# Altium PCB MSS_PCB.PcbDoc (part 1 of 2)
Units mm, origin at the board's own origin, x right, y up, seen from the top; angles counter-clockwise.
Board outline 160 x 110 mm, 4 copper layers (L1 (Signal), L2 (GND), L3 (GND), L4 (Signal)), stack 1.369 mm thick; 208 components, 129 nets, 584 pads, 198 vias.
Unrouted connection lines stored in the file: 1.
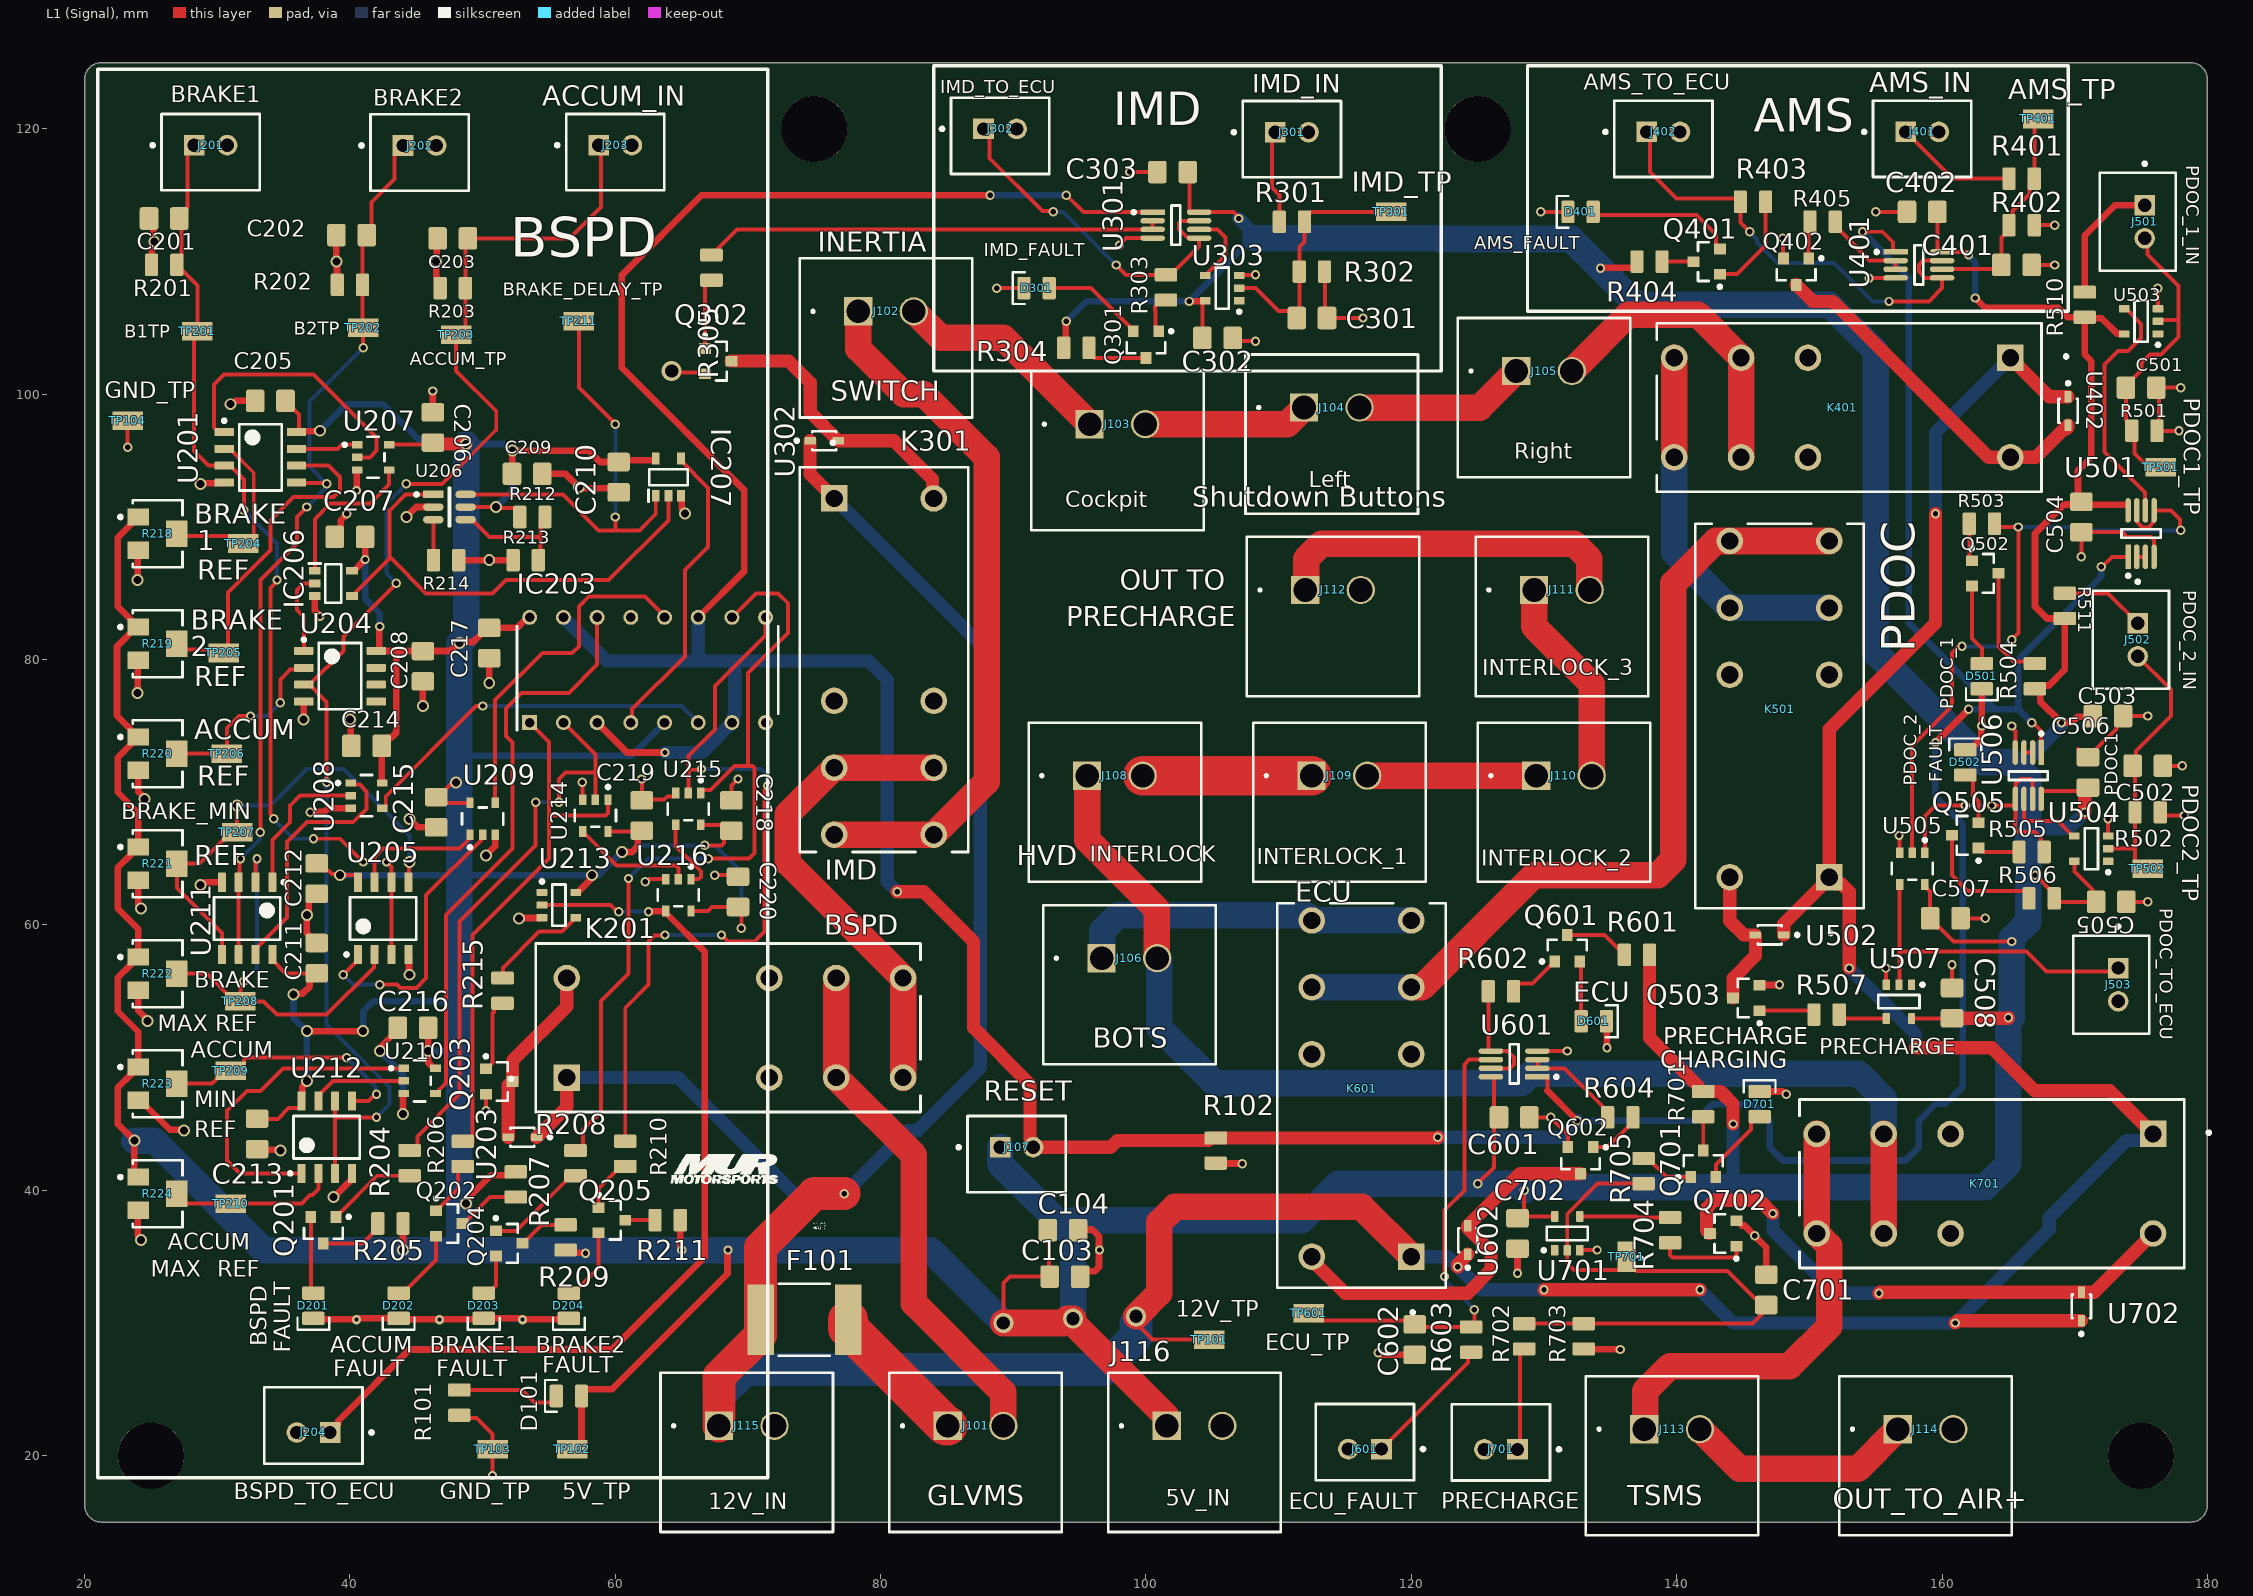
[diagram p0: L1 (Signal) view]
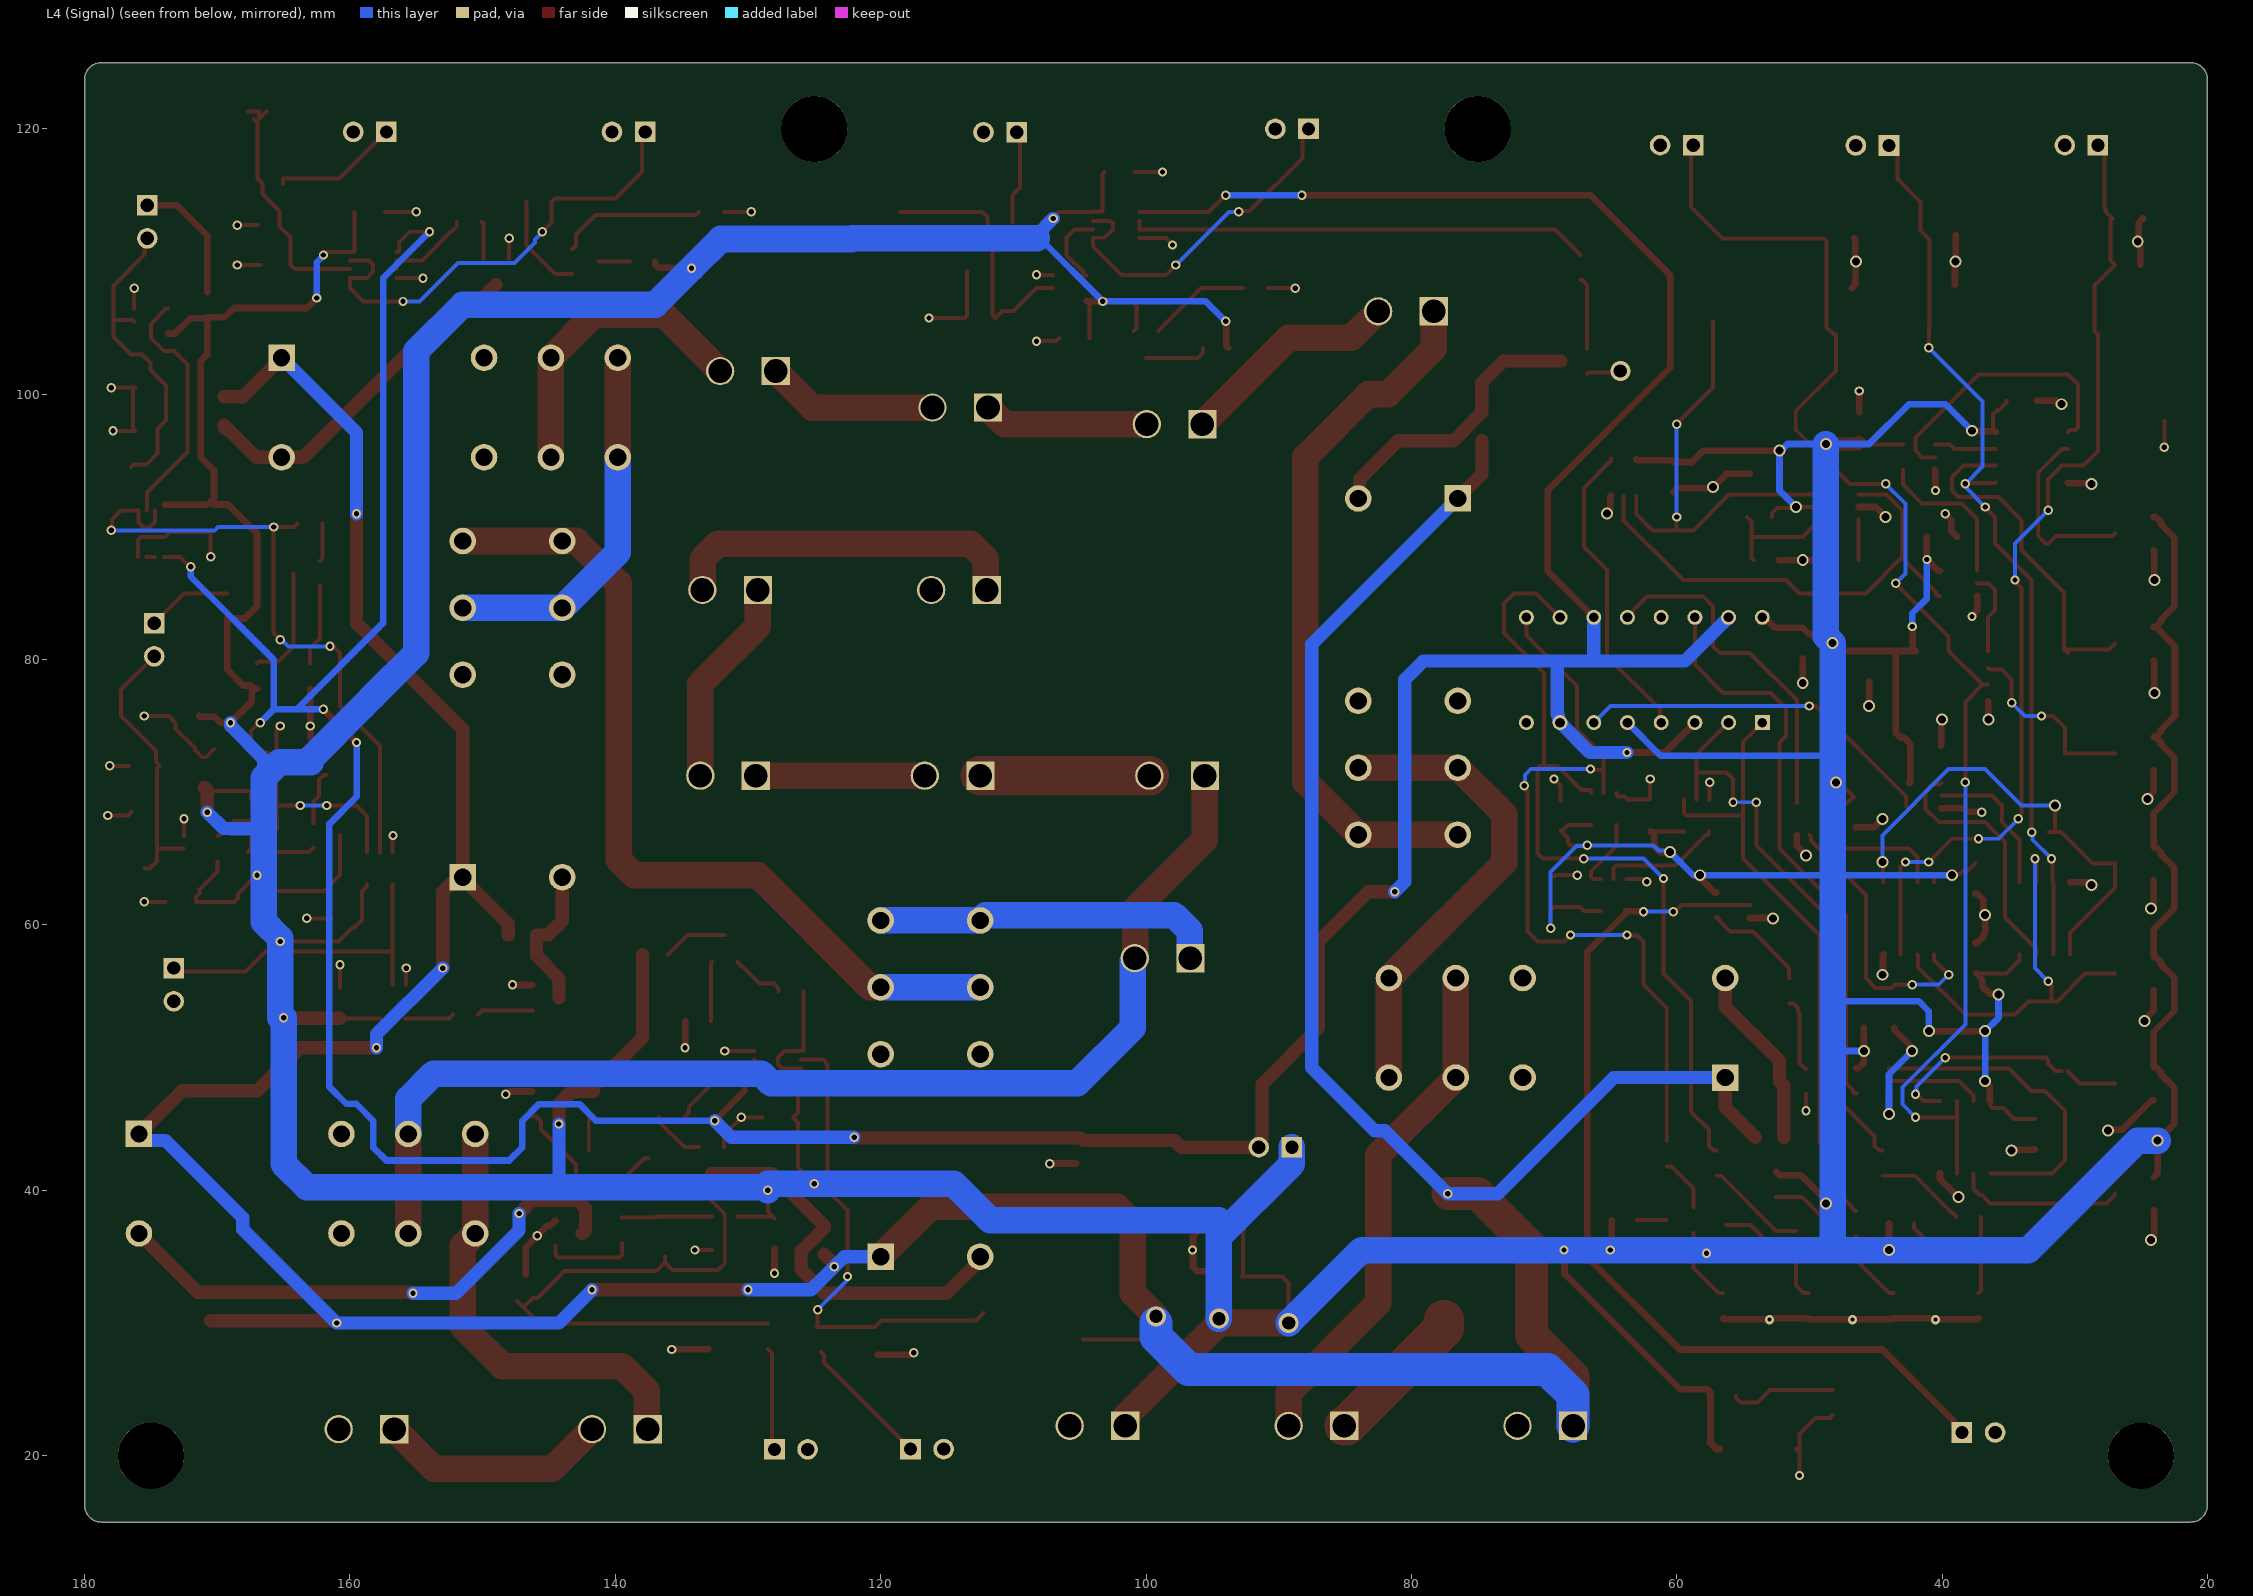
[diagram p1: L4 (Signal) view, seen from below]
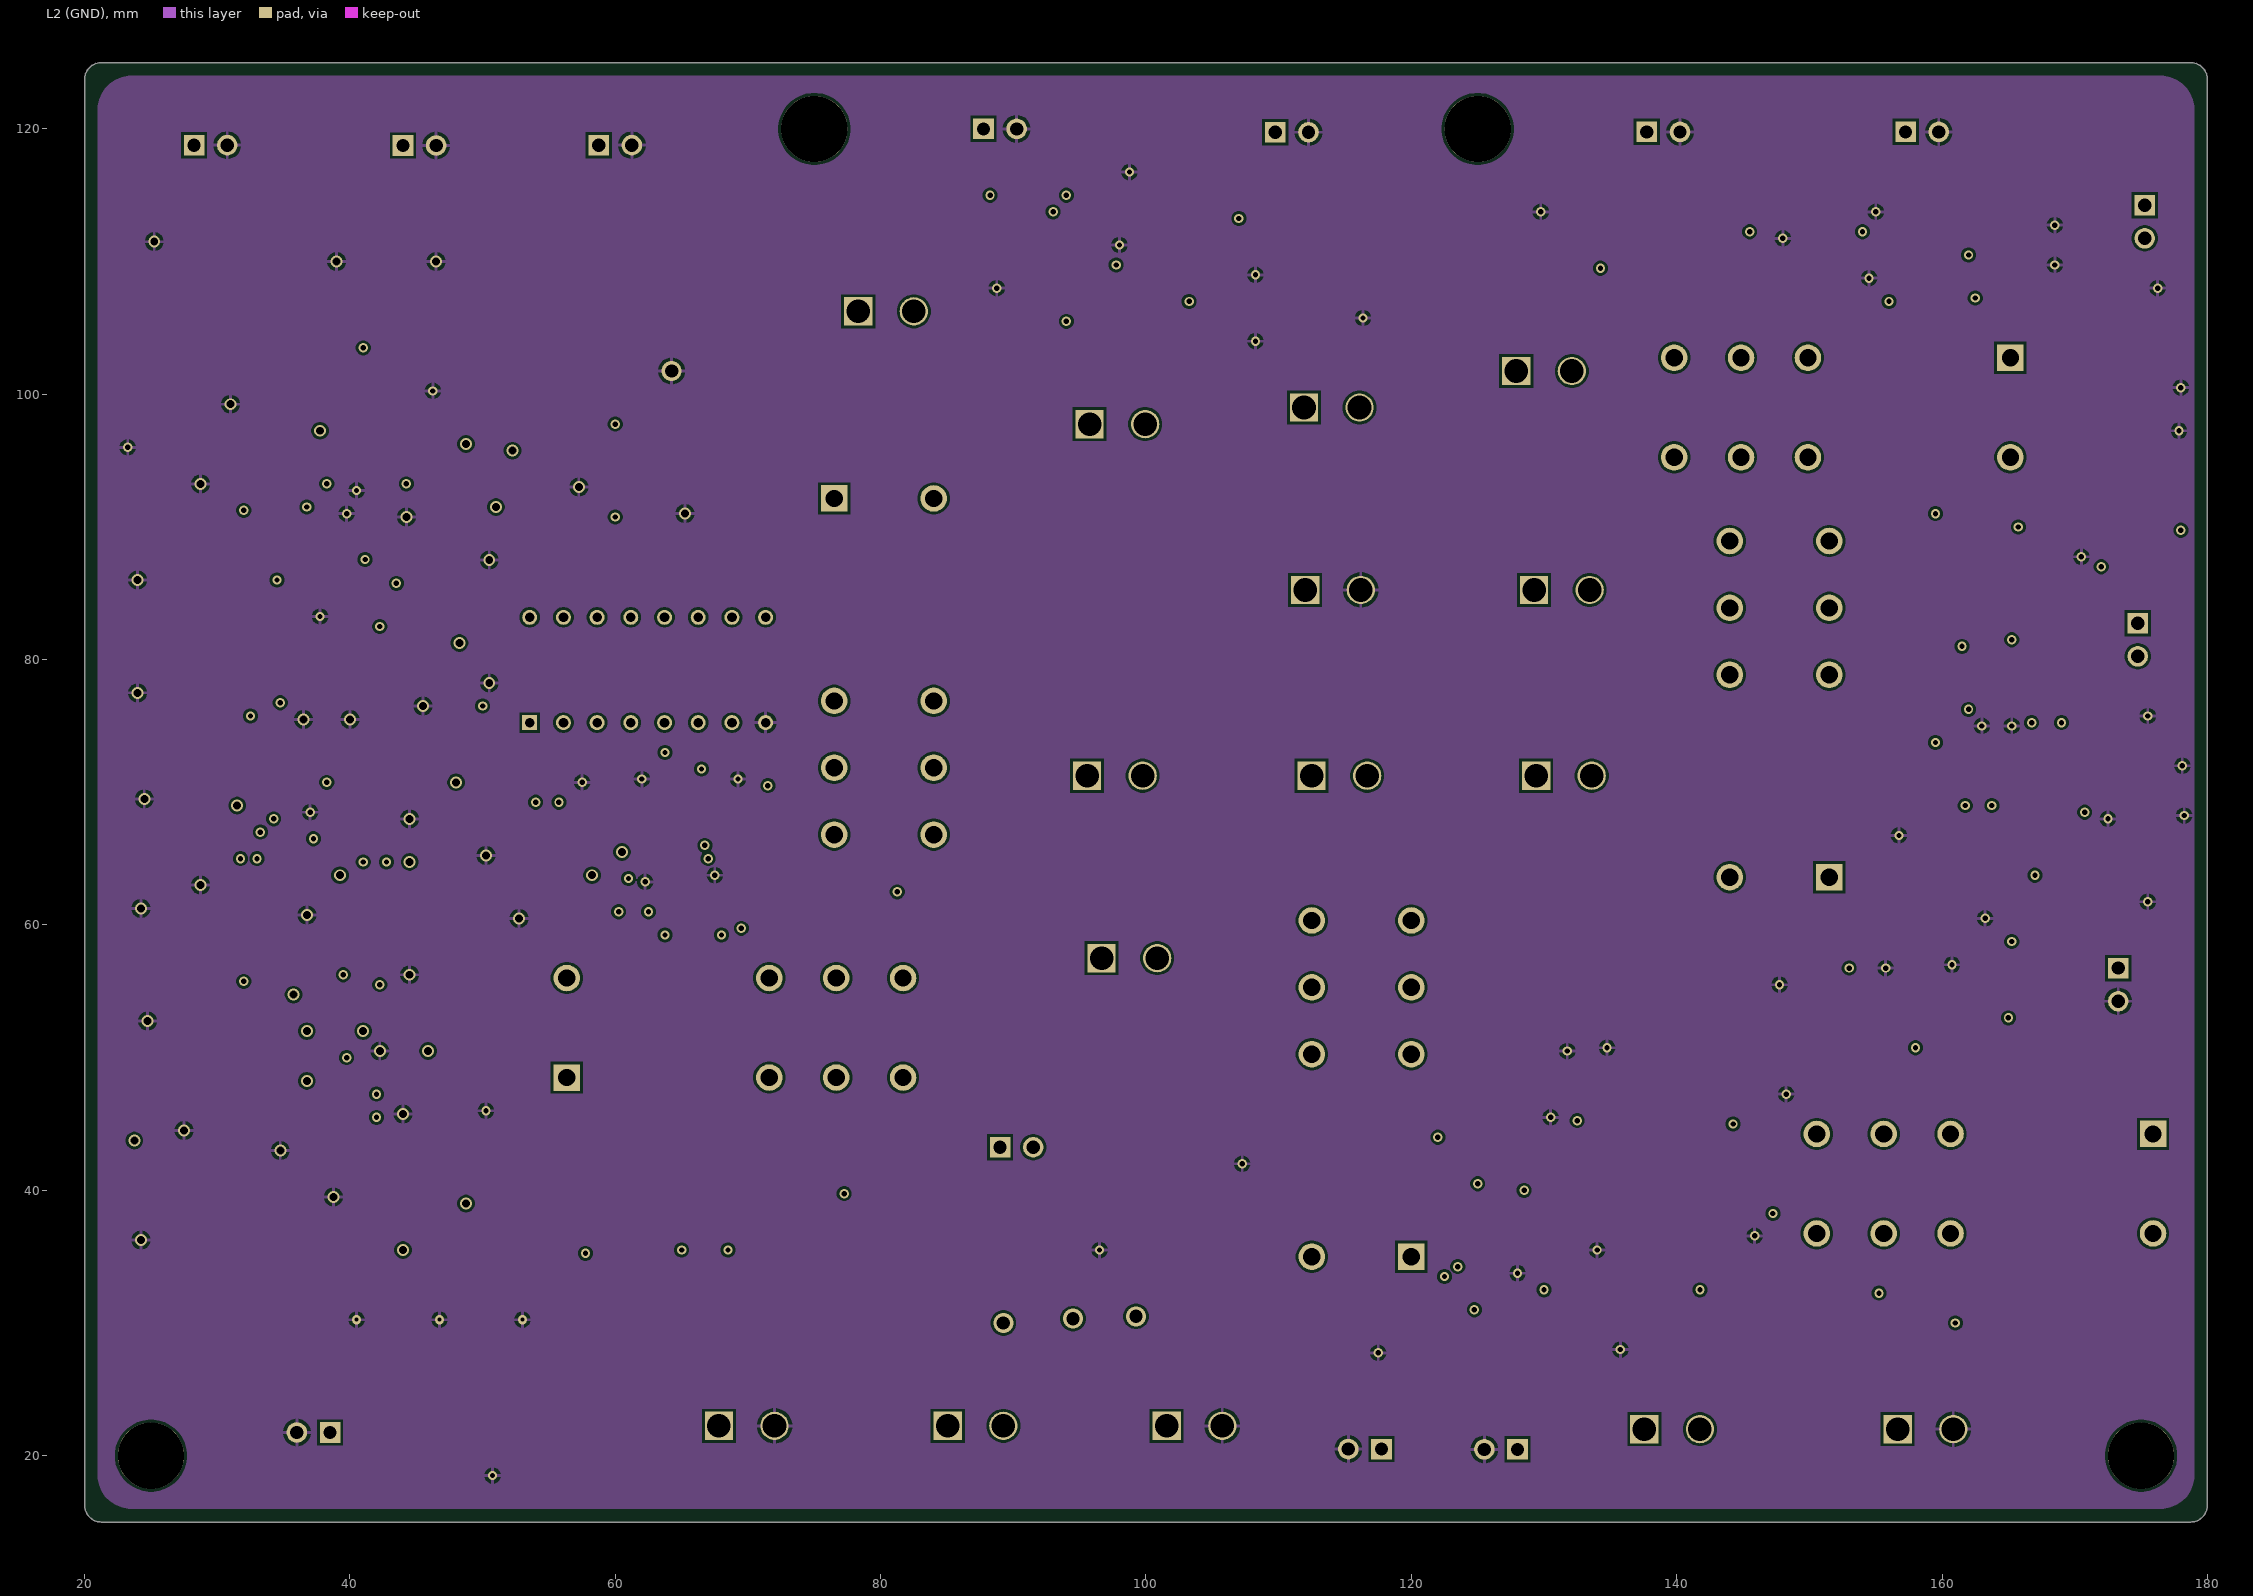
[diagram p2: L2 (GND)]
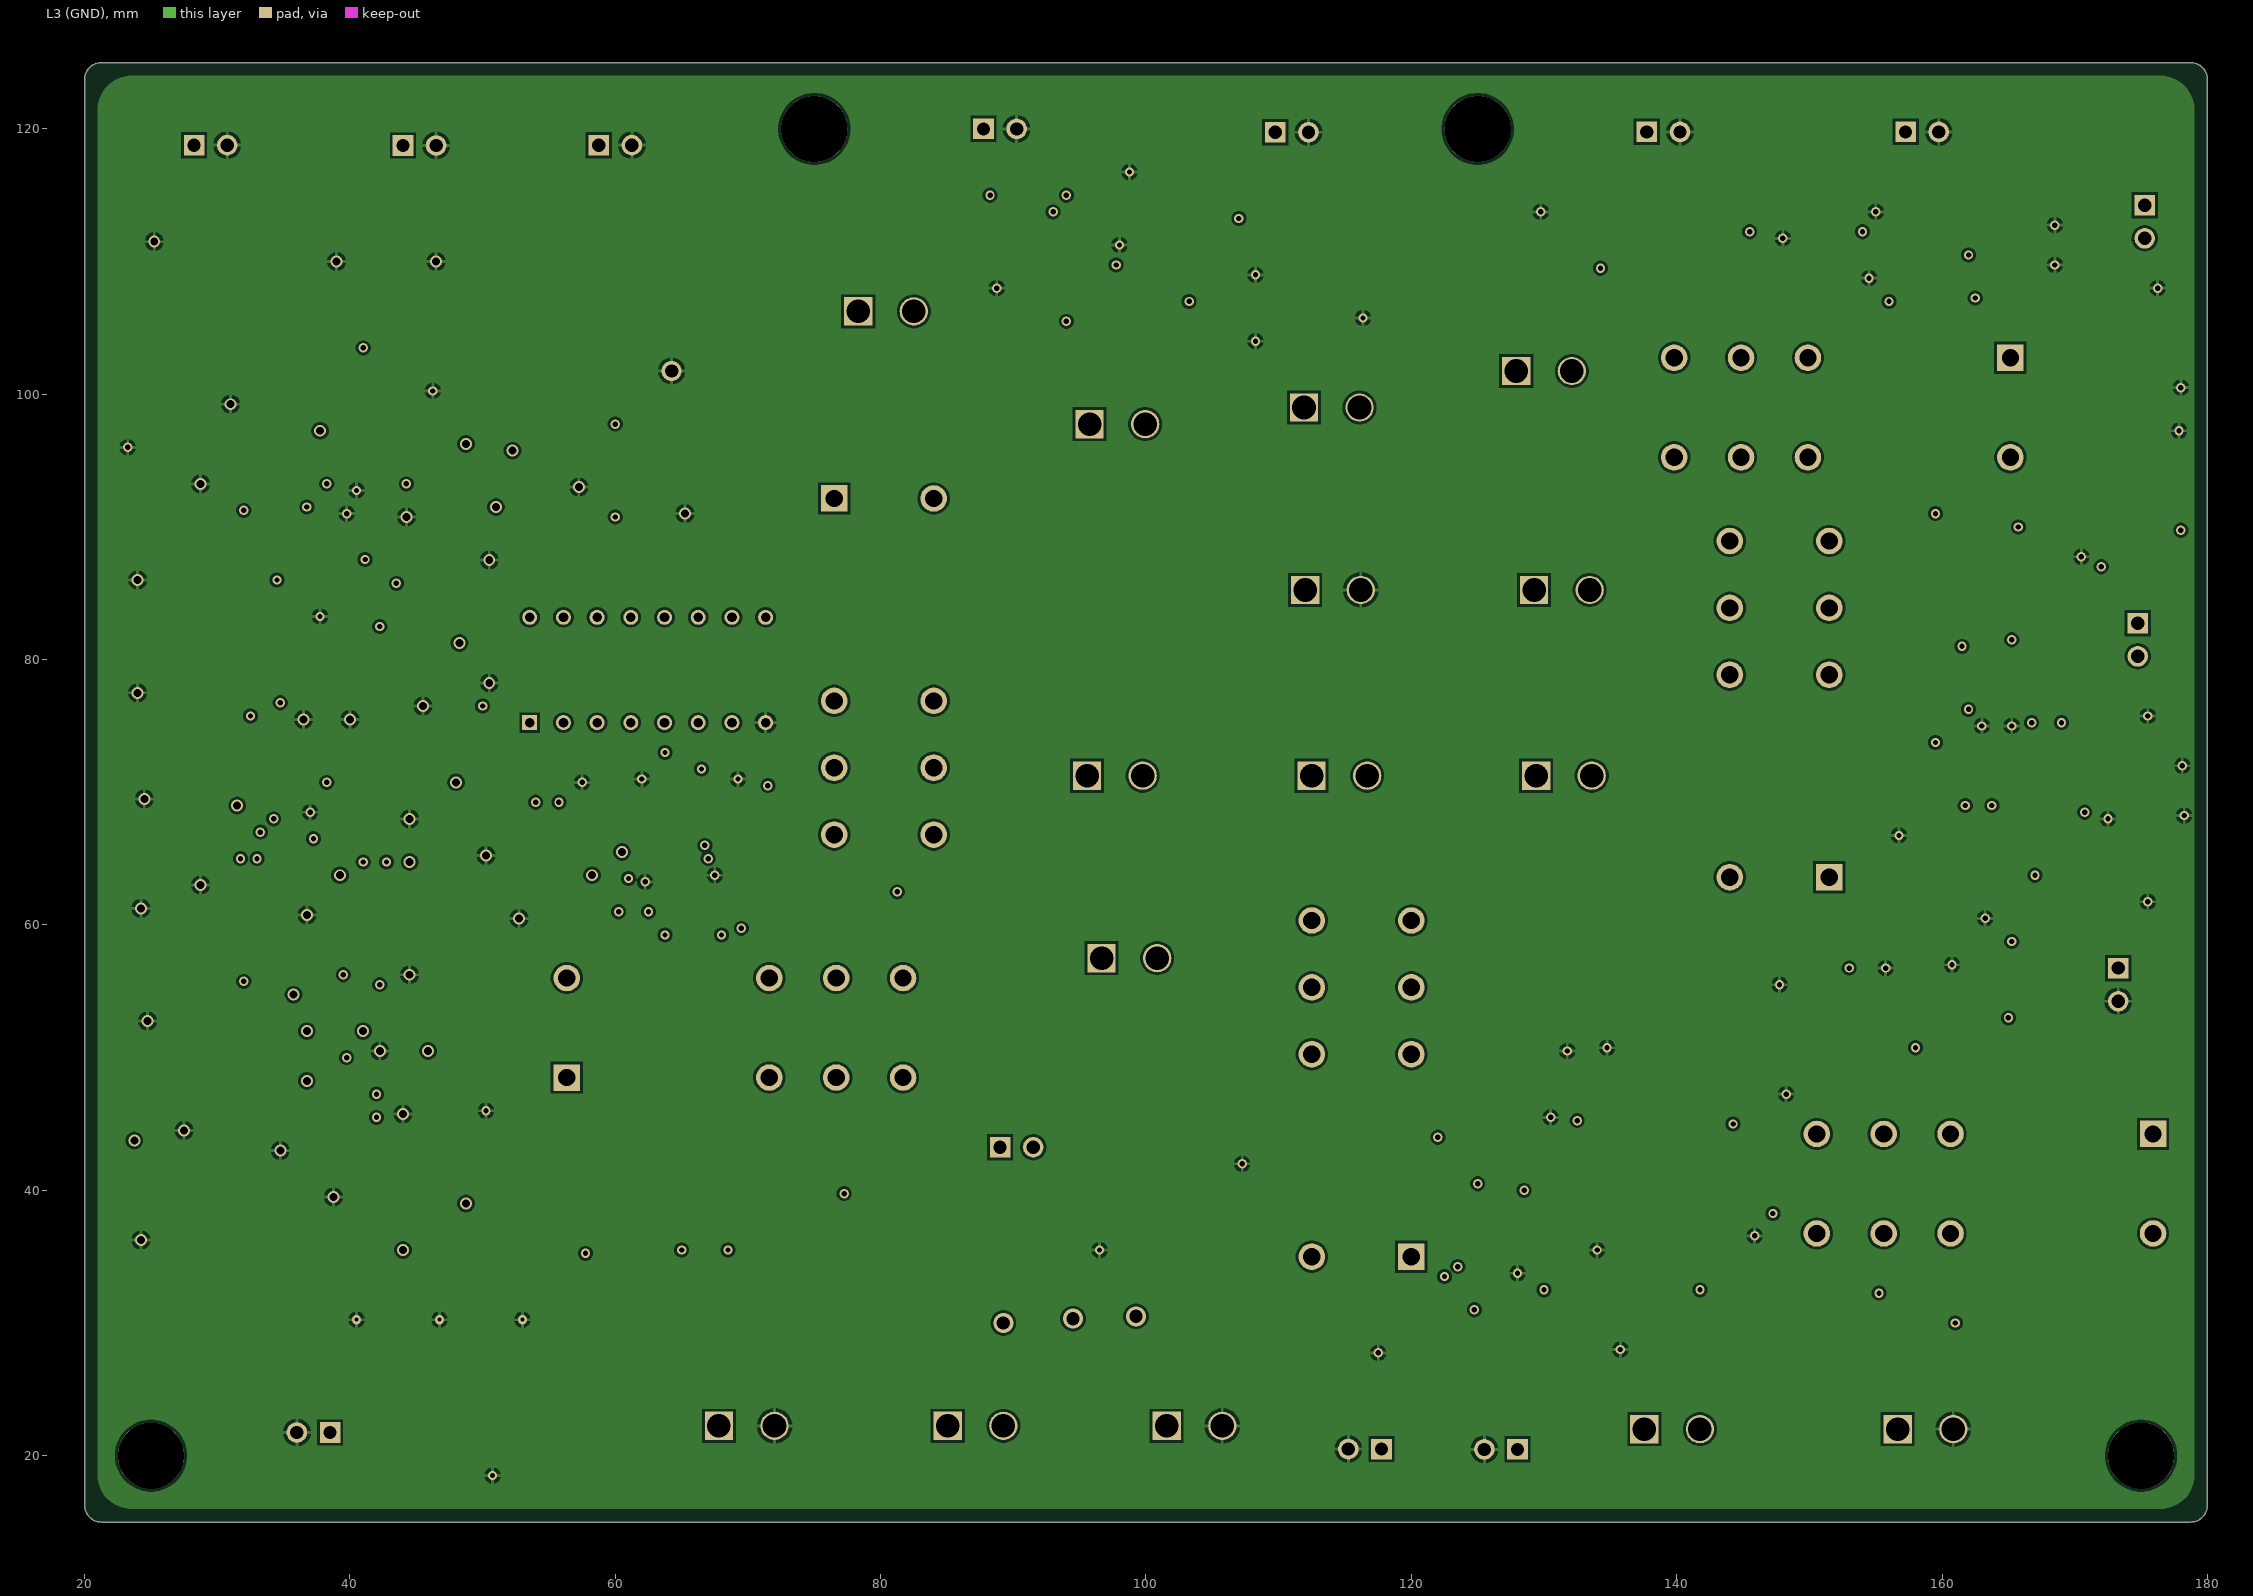
[diagram p3: L3 (GND)]
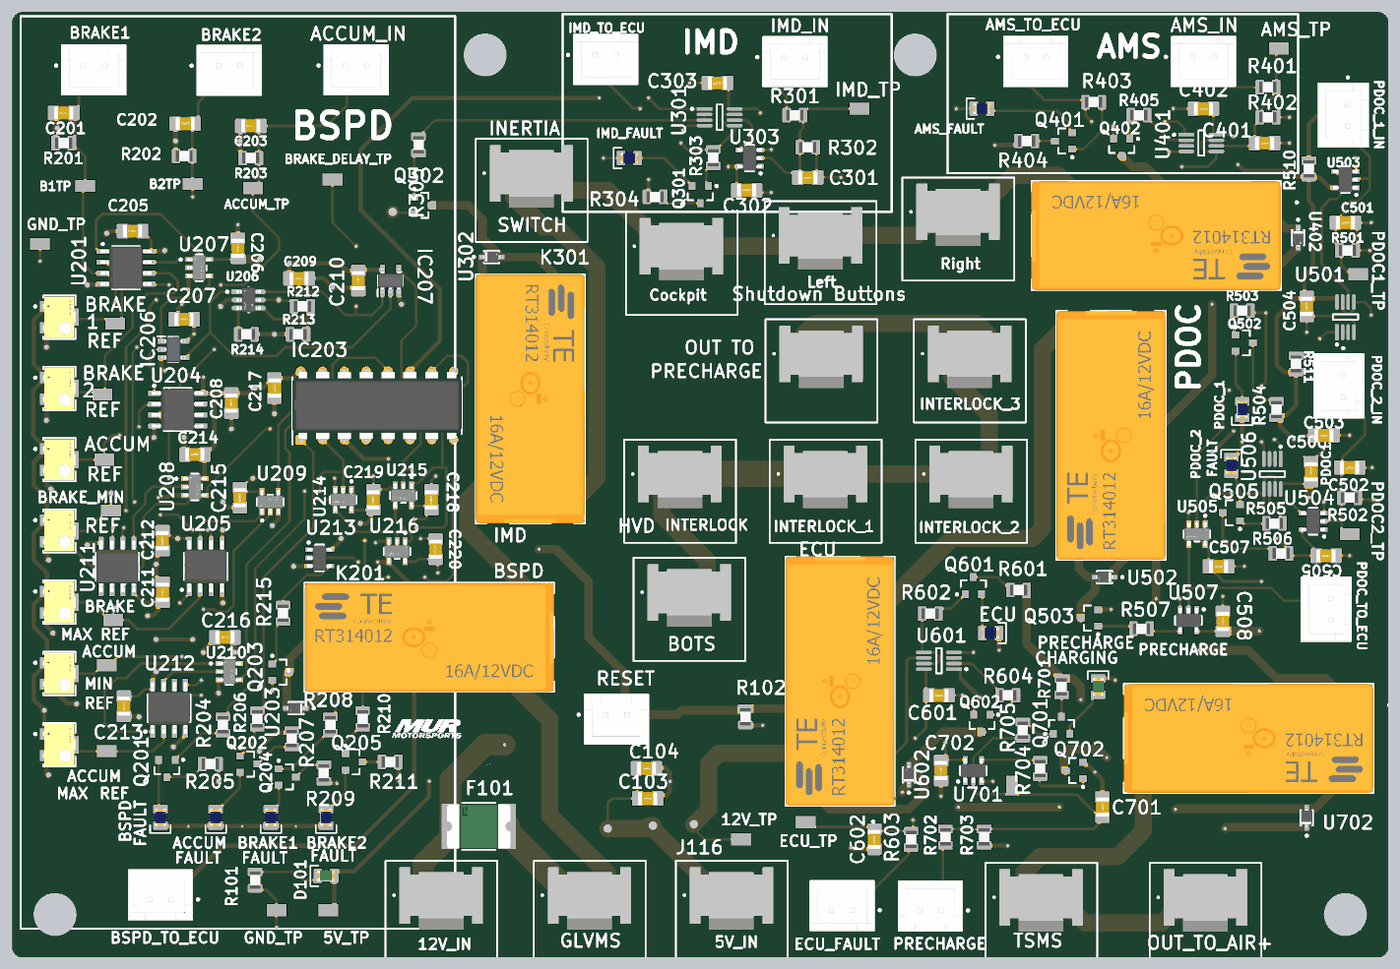
[diagram p5: 3D render of the assembled board from above, using the file's embedded part models]

## Layer stack, top to bottom
Top Solder: solder mask 0.0254, SM-001, Dk 4
L1 (Signal): signal copper 0.035
Dielectric 1: prepreg 0.1295, PP-017, Dk 4.3
Dielectric 2: prepreg 0.1295, PP-017, Dk 4.3
L2 (GND): signal copper 0.035
Dielectric 3: core 0.7112, Core-039, Dk 4.8
L3 (GND): signal copper 0.035
Dielectric 4: prepreg 0.1295, PP-017, Dk 4.3
Dielectric 5: prepreg 0.1295, PP-017, Dk 4.3
L4 (Signal): signal copper 0.035
Bottom Solder: solder mask 0.0254, SM-001, Dk 4

## Board outline
20,16.27 20,123.73 cw(c21.27,123.73) 21.27,125 178.73,125 cw(c178.73,123.73) 180,123.73 180,16.27 cw(c178.73,16.27) 178.73,15 21.27,15 cw(c21.27,16.27)

## Design rules (kind name [scope] priority, off if disabled: settings)
Clearance RULES [All] p1: gap=0.2 ignorepadtopadclearanceinfootprint=FALSE
PolygonConnect [All] p1: connectstyle=Relief reliefconductorwidth=0.254 reliefentries=4 polygonreliefangle="90 Angle" airgapwidth=0.254
RoutingVias [All] p1: holewidth=0.4 width=0.7 viastyle="Through Hole" minholewidth=0.1 minwidth=0.3 maxholewidth=3 maxwidth=5
SolderMaskExpansion [All] p1: expansion=0.102 istentingtop=FALSE
SupplyNets "Schematic Supply Nets_3" [InNet('+12V')] p1: voltage=0.000
SupplyNets "Schematic Supply Nets_2" [InNet('GND')] p2: voltage=0.000
SupplyNets "Schematic Supply Nets_1" [InNet('RESET')] p3: voltage=0.000
SupplyNets "Schematic Supply Nets" [InNet('+5V')] p4: voltage=0.000
UnRoutedNet [All] p1: checkbadconnections=TRUE
Width [All] p1: maxlimit=3 minlimit=0.1 preferedwidth=0.3 midlayer1_minwidth=0.254 midlayer1_maxwidth=0.254 midlayer1_prefwidth=0.254 midlayer2_minwidth=0.254 midlayer2_maxwidth=0.254 midlayer2_prefwidth=0.254 minimp=50.000000 maximp=50.000000 favimp=50.000000
29 further rules are at their usual default settings.

## Classes and differential pairs
component class 7_PRECHARGE.chDoc: C701 C702 D701 J701 K701 Q701 Q702 R701 R702 R703 R704 R705 TP701 U701 U702
component class 6_ECU: C601 C602 D601 H601 H602 H603 H604 J601 K601 Q601 Q602 R601 R602 R603 R604 TP601 U601 U602
component class 5_PDOC: C501 C502 C503 C504 C505 C506 C507 C508 C? D501 D502 J501 J502 J503 K501 Q502 Q503 Q505 R501 R502 R503 R504 R505 R506 R507 R510 R511 R? TP501 TP502 U501 U502 U503 U504 U505 U506 U507
component class 4_AMS: C401 C402 D401 J401 J402 K401 Q401 Q402 R401 R402 R403 R404 R405 TP401 U401 U402
component class 3_IMD: C301 C302 C303 D301 J301 J302 K301 Q301 Q302 R301 R302 R303 R304 R305 TP301 U301 U302 U303
component class 2_BSPD: C201 C202 C203 C205 C206 C207 C208 C209 C210 C211 C212 C213 C214 C215 C216 C217 C218 C219 C220 D201 D202 D203 D204 IC203 IC206 IC207 J201 J202 J203 J204 K201 Q201 Q202 Q203 Q204 Q205 R201 R202 R203 R204 R205 R206 R207 R208 R209 R210 R211 R212 R213 R214 R215 R218 R219 R220 R221 R222 R223 R224 TP201 TP202 TP203 TP204 TP205 TP206 TP207 TP208 TP209 TP210 TP211 U201 U203 U204 U205 U206 U207 U208 U209 U210 U211 U212 U213 U214 U215 U216
component class 1_Shutdown_Circuit: C103 C104 D101 F101 J101 J102 J103 J104 J105 J106 J107 J108 J109 J110 J111 J112 J113 J114 J115 J116 R101 R102 TP101 TP102 TP103 TP104

## Components (designator, comment, footprint, x,y, rotation, side; value= is the part's Value field where it differs from the comment)
C103 "22u" CAP_0805 93.893,33.5 r180 top
C104 "100n" CAP_0805 93.75,37 r180 top
C201 "100n" CAP_0805 26,113.25 r0 top
C202 "100n" CAP_0805 40.125,112 r0 top
C203 "100n" CAP_0805 47.75,111.75 r0 top
C205 "100n" CAP_0805 34,99.5 r0 top
C206 "100n" CAP_0805 46.25,97.5 r270 top
C207 "100n" CAP_0805 40,89.25 r0 top
C208 "100n" CAP_0805 45.5,79.5 r90 top
C209 "100n" CAP_0805 53.357,94 r180 top
C210 "100n" CAP_0805 60.25,93.75 r90 top
C211 "100n" CAP_0805 37.5,57.5 r270 top
C212 "100n" CAP_0805 37.5,63.5 r90 top
C213 "100n" CAP_0805 33,44.25 r90 top
C214 "100n" CAP_0805 41.25,73.5 r0 top
C215 "100n" CAP_0805 46.5,68.5 r90 top
C216 "100n" CAP_0805 44.75,52.25 r0 top
C217 "100n" CAP_0805 50.5,81.25 r270 top
C218 "100n" CAP_0805 68.75,68.25 r90 top
C219 "100n" CAP_0805 62,68.25 r90 top
C220 "100n" CAP_0805 69.25,62.5 r90 top
C301 "1u" CAP_0805 112.5,105.75 r180 top
C302 "100n" CAP_0805 105.393,104.25 r0 top
C303 "100n" CAP_0805 102,116.75 r180 top
C401 "1u" CAP_0805 165.607,109.75 r180 top
C402 "100n" CAP_0805 158.5,113.75 r180 top
C501 "100n" CAP_0805 175,100.5 r180 top
C502 "100n" CAP_0805 175.5,72 r180 top
C503 "100n" CAP_0805 172.5,75.75 r180 top
C504 "100n" CAP_0805 170.5,90.75 r90 top
C505 "100n" CAP_0805 172.75,61.75 r180 top
C506 "100n" CAP_0805 171,71.5 r270 top
C507 "100n" CAP_0805 160.25,60.5 r180 top
C508 "100n" CAP_0805 160.75,54.107 r270 top
C601 "100n" CAP_0805 127.75,45.5 r180 top
C602 "1u" CAP_0805 120.25,28.75 r90 top
C701 "1u" CAP_0805 146.75,32.5 r270 top
C702 "100n" CAP_0805 128,36.75 r90 top
D101 "GREEN" LED_0805_GREEN 56.5,24.5 r0 top
D201 "BLUE" LED_0805_BLUE 37.25,31.3 r90 top
D202 "BLUE" LED_0805_BLUE 43.667,31.3 r90 top
D203 "BLUE" LED_0805_BLUE 50.083,31.3 r90 top
D204 "BLUE" LED_0805_BLUE 56.5,31.3 r90 top
D301 "BLUE" LED_0805_BLUE 91.75,108 r0 top
D401 "BLUE" LED_0805_BLUE 132.75,113.75 r0 top
D501 "BLUE" LED_0805_BLUE 163,78.75 r90 top
D502 "BLUE" LED_0805_BLUE 161.75,72.25 r270 top
D601 "BLUE" LED_0805_BLUE 133.75,52.75 r180 top
D701 "GREEN" LED_0805_GREEN 146.25,46.5 r270 top
F101 "2920L185DR" FP-2920L-MFG 74.25,30.25 r0 top value=0.05-0.15Ω
IC203 "CD4043BE" DIP794W53P254L1930H508Q16N 62.44,79.22 r90 top
IC206 "BU4S81G2-TR" SOT95P280X125-5N 38.75,85.75 r0 top
IC207 "BU4S81G2-TR" SOT95P280X125-5N 64,93.75 r90 top
J101 "IPBT-102-H1-T-S-K" SAMTEC_IPBT-102-H1-T-S-K 87.155,22.25 r0 top
J102 "IPBT-102-H1-T-S-K" SAMTEC_IPBT-102-H1-T-S-K 80.405,106.25 r0 top
J103 "IPBT-102-H1-T-S-K" SAMTEC_IPBT-102-H1-T-S-K 97.845,97.75 r0 top
J104 "IPBT-102-H1-T-S-K" SAMTEC_IPBT-102-H1-T-S-K 114,99 r0 top
J105 "IPBT-102-H1-T-S-K" SAMTEC_IPBT-102-H1-T-S-K 130,101.75 r0 top
J106 "IPBT-102-H1-T-S-K" SAMTEC_IPBT-102-H1-T-S-K 98.75,57.5 r0 top
J107 "B2B-XH-A(LF)(SN)" FP-B2B-XH-A_LF_SN-MFG 90.25,42.725 r0 top
J108 "IPBT-102-H1-T-S-K" SAMTEC_IPBT-102-H1-T-S-K 97.655,71.25 r0 top
J109 "IPBT-102-H1-T-S-K" SAMTEC_IPBT-102-H1-T-S-K 114.578,71.25 r0 top
J110 "IPBT-102-H1-T-S-K" SAMTEC_IPBT-102-H1-T-S-K 131.5,71.25 r0 top
J111 "IPBT-102-H1-T-S-K" SAMTEC_IPBT-102-H1-T-S-K 131.345,85.25 r0 top
J112 "IPBT-102-H1-T-S-K" SAMTEC_IPBT-102-H1-T-S-K 114.095,85.25 r0 top
J113 "IPBT-102-H1-T-S-K" SAMTEC_IPBT-102-H1-T-S-K 139.655,22 r0 top
J114 "IPBT-102-H1-T-S-K" SAMTEC_IPBT-102-H1-T-S-K 158.75,22 r0 top
J115 "IPBT-102-H1-T-S-K" SAMTEC_IPBT-102-H1-T-S-K 69.905,22.25 r0 top
J116 "IPBT-102-H1-T-S-K" SAMTEC_IPBT-102-H1-T-S-K 103.655,22.25 r0 top
J201 "B2B-XH-A(LF)(SN)" FP-B2B-XH-A_LF_SN-MFG 29.5,118.25 r0 top
J202 "B2B-XH-A(LF)(SN)" FP-B2B-XH-A_LF_SN-MFG 45.25,118.225 r0 top
J203 "B2B-XH-A(LF)(SN)" FP-B2B-XH-A_LF_SN-MFG 60,118.25 r0 top
J204 "B2B-XH-A(LF)(SN)" FP-B2B-XH-A_LF_SN-MFG 37.25,22.275 r180 top
J301 "B2B-XH-A(LF)(SN)" FP-B2B-XH-A_LF_SN-MFG 111,119.225 r0 top
J302 "B2B-XH-A(LF)(SN)" FP-B2B-XH-A_LF_SN-MFG 89,119.475 r0 top
J401 "B2B-XH-A(LF)(SN)" FP-B2B-XH-A_LF_SN-MFG 158.5,119.25 r0 top
J402 "B2B-XH-A(LF)(SN)" FP-B2B-XH-A_LF_SN-MFG 139,119.25 r0 top
J501 "B2B-XH-A(LF)(SN)" FP-B2B-XH-A_LF_SN-MFG 174.75,113 r270 top
J502 "B2B-XH-A(LF)(SN)" FP-B2B-XH-A_LF_SN-MFG 174.225,81.5 r270 top
J503 "B2B-XH-A(LF)(SN)" FP-B2B-XH-A_LF_SN-MFG 172.75,55.5 r270 top
J601 "B2B-XH-A(LF)(SN)" FP-B2B-XH-A_LF_SN-MFG 116.5,21.025 r180 top
J701 "B2B-XH-A(LF)(SN)" FP-B2B-XH-A_LF_SN-MFG 126.75,21 r180 top
K201 "RT314012" FP-RT314012-MFG 68.5,52.25 r0 top
K301 "RT314012" FP-RT314012-MFG 80.25,80 r270 top
K401 "RT314012" FP-RT314012-MFG 153,99 r180 top
K501 "RT314012" FP-RT314012-MFG 147.75,75.75 r90 top
K601 "RT314012" FP-RT314012-MFG 116.25,47.15 r90 top
K701 "RT314012" FP-RT314012-MFG 163.75,40.5 r180 top
Q201 "MMBT5550LT1G" ONSC-SOT-23-3-318-08_V 38,37 r270 top
Q202 "MMBT5550LT1G" ONSC-SOT-23-3-318-08_V 47.5,37.5 r0 top
Q203 "MMBT5550LT1G" ONSC-SOT-23-3-318-08_V 51.25,48.2 r0 top
Q204 "MMBT5550LT1G" ONSC-SOT-23-3-318-08_V 52,36 r0 top
Q205 "MMBT5550LT1G" ONSC-SOT-23-3-318-08_V 59.75,37.75 r0 top
Q301 "MMBT5550LT1G" ONSC-SOT-23-3-318-08_V 100,103.75 r270 top
Q302 "MMBT5550LT1G" ONSC-SOT-23-3-318-08_V 67.75,102.5 r0 top
Q401 "MMBT5550LT1G" ONSC-SOT-23-3-318-08_V 142.25,110 r180 top
Q402 "MMBT5550LT1G" ONSC-SOT-23-3-318-08_V 149,109.25 r270 top
Q502 "MMBT5550LT1G" ONSC-SOT-23-3-318-08_V 163.25,86.5 r0 top
Q503 "MMBT5550LT1G" ONSC-SOT-23-3-318-08_V 145.25,54.5 r180 top
Q505 "MMBT5550LT1G" ONSC-SOT-23-3-318-08_V 161.75,66.75 r180 top
Q601 "MMBT5550LT1G" ONSC-SOT-23-3-318-08_V 131.75,58.25 r90 top
Q602 "MMBT5550LT1G" ONSC-SOT-23-3-318-08_V 132.75,42.25 r270 top
Q701 "MMBT5550LT1G" ONSC-SOT-23-3-318-08_V 142,42 r90 top
Q702 "MMBT5550LT1G" ONSC-SOT-23-3-318-08_V 143.5,36.75 r180 top
R101 "200" RES_0805 48.25,24 r90 top
R102 "10k" RES_0805 105.25,43 r90 top
R201 "1000k" RES_0805 26,109.75 r0 top
R202 "1000k" RES_0805 40,108.25 r0 top
R203 "1000k" RES_0805 47.75,108 r0 top
R204 "20k" RES_0805 44.5,42.05 r90 top
R205 "200" RES_0805 43.05,37.5 r0 top
R206 "20k" RES_0805 48.5,42.75 r90 top
R207 "200" RES_0805 52.5,40.45 r90 top
R208 "20k" RES_0805 57,42.05 r90 top
R209 "200" RES_0805 56.25,36.45 r270 top
R210 "20k" RES_0805 60.75,42.75 r90 top
R211 "200" RES_0805 63.95,37.75 r0 top
R212 "1000k" RES_0805 53.75,90.75 r180 top
R213 "681k" RES_0805 53.25,87.5 r180 top
R214 "75k" RES_0805 47.25,87.5 r180 top
R215 "560" RES_0805 51.5,55.05 r270 top
R218 "PVG5A104C03R00" FP-PVG5A-MFG 25.5,89.5 r270 top
R219 "PVG5A104C03R00" FP-PVG5A-MFG 25.5,81.208 r270 top
R220 "PVG5A104C03R00" FP-PVG5A-MFG 25.5,72.917 r270 top
R221 "PVG5A104C03R00" FP-PVG5A-MFG 25.5,64.625 r270 top
R222 "PVG5A104C03R00" FP-PVG5A-MFG 25.5,56.333 r270 top
R223 "PVG5A104C03R00" FP-PVG5A-MFG 25.5,48.042 r270 top
R224 "PVG5A104C03R00" FP-PVG5A-MFG 25.5,39.75 r270 top
R301 "14k" RES_0805 111,113 r0 top
R302 "10k" RES_0805 112.5,109.25 r180 top
R303 "20k" RES_0805 101.5,108.05 r90 top
R304 "200" RES_0805 94.75,103.5 r180 top
R305 "560" RES_0805 67.25,109.55 r270 top
R401 "14k" RES_0805 166,116.25 r0 top
R402 "10k" RES_0805 166,112.75 r180 top
R403 "20k" RES_0805 145.75,114.5 r180 top
R404 "200" RES_0805 137.95,110 r180 top
R405 "560" RES_0805 151,113 r180 top
R501 "100k" RES_0805 175.25,97.25 r180 top
R502 "100k" RES_0805 175.5,68.5 r180 top
R503 "20k" RES_0805 163,90.25 r0 top
R504 "200" RES_0805 167,78.75 r270 top
R505 "20k" RES_0805 166.75,65.5 r0 top
R506 "200" RES_0805 167.5,62 r0 top
R507 "560" RES_0805 151.3,53.25 r180 top
R510 "560" RES_0805 170.75,106.75 r270 top
R511 "560" RES_0805 169.25,84.05 r270 top
R601 "200" RES_0805 137,57.75 r0 top
R602 "20k" RES_0805 126.75,55 r180 top
R603 "3k" RES_0805 124.5,28.75 r90 top
R604 "560" RES_0805 135.75,45.5 r0 top
R701 "200" RES_0805 142,46.5 r90 top
R702 "14k" RES_0805 128.5,29 r90 top
R703 "10k" RES_0805 133,29 r90 top
R704 "560" RES_0805 139.5,37 r270 top
R705 "20k" RES_0805 137.5,41.45 r270 top
TP101 "RCT-0C" RCT-0C 104.75,28.75 r180 top
TP102 "RCT-0C" RCT-0C 56.75,20.5 r180 top
TP103 "RCT-0C" RCT-0C 50.75,20.5 r180 top
TP104 "RCT-0C" RCT-0C 23.25,98 r180 top
TP201 "RCT-0C" RCT-0C 28.5,104.75 r0 top
TP202 "RCT-0C" RCT-0C 41,105 r180 top
TP203 "RCT-0C" RCT-0C 48,104.5 r180 top
TP204 "RCT-0C" RCT-0C 31.975,88.75 r0 top
TP205 "RCT-0C" RCT-0C 30.5,80.5 r0 top
TP206 "RCT-0C" RCT-0C 30.717,72.917 r180 top
TP207 "RCT-0C" RCT-0C 31.5,67 r180 top
TP208 "RCT-0C" RCT-0C 31.75,54.25 r180 top
TP209 "RCT-0C" RCT-0C 31,49 r180 top
TP210 "RCT-0C" RCT-0C 31,39 r180 top
TP211 "RCT-0C" RCT-0C 57.25,105.5 r180 top
TP301 "RCT-0C" RCT-0C 118.5,113.75 r180 top
TP401 "RCT-0C" RCT-0C 167.25,120.75 r0 top
TP501 "RCT-0C" RCT-0C 176.5,94.5 r180 top
TP502 "RCT-0C" RCT-0C 175.5,64.25 r180 top
TP601 "RCT-0C" RCT-0C 112.25,30.75 r180 top
TP701 "RCT-0C" RCT-0C 136.25,35 r270 top
U201 "TLC2272AQDRQ1" D0008A_N 33.25,95.25 r0 top
U203 "BAT54JFILM" FP-SOD323-MFG 53,44 r180 top value=7pF
U204 "TLC2272AQDRQ1" D0008A_N 39.25,78.75 r0 top
U205 "TLC2272AQDRQ1" D0008A_N 42.5,60.5 r90 top
U206 "LTC6994IS6-2#TRMPBF" FP-S6-6-05-08-1636-IPC_A 47.5,91.5 r0 top
U207 "74LVC1G32GV,125" FP-SOT753-MFG 41.75,95.25 r0 top
U208 "74LVC1G32GV,125" FP-SOT753-MFG 41.25,69.75 r0 top
U209 "74LVC1G32GV,125" FP-SOT753-MFG 50,68 r90 top
U210 "74LVC1G32GV,125" FP-SOT753-MFG 45.25,48.25 r0 top
U211 "TLC2272AQDRQ1" D0008A_N 32.25,60.5 r270 top
U212 "TLC2272AQDRQ1" D0008A_N 38.25,44 r90 top
U213 "SN74LVC1G14DBVR" DBV0005A_L 55.75,61.5 r0 top
U214 "74LVC1G32GV,125" FP-SOT753-MFG 58.5,68.25 r270 top
U215 "74LVC1G32GV,125" FP-SOT753-MFG 65.5,68.75 r270 top
U216 "74LVC1G32GV,125" FP-SOT753-MFG 64.75,62.25 r270 top
U301 "SN74LVC2G02DCTR" FP-DCT0008A-IPC_A 102.25,112.75 r0 top
U302 "BAT54JFILM" FP-SOD323-MFG 75.75,96.5 r0 top value=7pF
U303 "SN74LVC1G14DBVR" DBV0005A_L 105.75,108 r180 top
U401 "SN74LVC2G02DCTR" FP-DCT0008A-IPC_A 158.25,109.75 r0 top
U402 "BAT54JFILM" FP-SOD323-MFG 169.5,98.75 r270 top value=7pF
U501 "SN74LVC2G02DCTR" FP-DCT0008A-IPC_A 175,89.5 r90 top
U502 "BAT54JFILM" FP-SOD323-MFG 147,59.25 r180 top value=7pF
U503 "SN74LVC1G14DBVR" DBV0005A_L 175,105.5 r180 top
U504 "SN74LVC1G14DBVR" DBV0005A_L 171.25,65.75 r180 top
U505 "74LVC1G32GV,125" FP-SOT753-MFG 157.75,64.25 r270 top
U506 "SN74LVC2G02DCTR" FP-DCT0008A-IPC_A 166.5,71.25 r270 top
U507 "SN74LVC1G14DBVR" DBV0005A_L 156.75,54.225 r270 top
U601 "SN74LVC2G02DCTR" FP-DCT0008A-IPC_A 127.75,49.525 r180 top
U602 "BAT54JFILM" FP-SOD323-MFG 124.25,36.25 r90 top value=7pF
U701 "SN74LVC1G14DBVR" DBV0005A_L 131.75,36.75 r90 top
U702 "BAT54JFILM" FP-SOD323-MFG 170.5,31.25 r90 top value=7pF

## Footprints (in the part's own frame and the unit in brackets; to place one, negate y for a bottom-side part, rotate by r counter-clockwise, add the part's x,y. Pads: shape width x height; smd on the part's side, far side on the other; paste and mask are expansions set on the pad)
CAP_0805 [mm]
  rrect25% 1.4x1.7 smd: 1(-1.143,0) 2(1.143,0)
  body extent -1.15,-0.76 1.15,0.79, height 1.01
D0008A_N [mm] "SOIC, 8-Leads, Body 5x4mm, Pitch 1.27mm, IPC Medium Density"
  rrect17% 1.45x0.6 smd: 1(-2.725,1.905) 2(-2.725,0.635) 3(-2.725,-0.635) 4(-2.725,-1.905) 5(2.725,-1.905) 6(2.725,-0.635) 7(2.725,0.635) 8(2.725,1.905)
  silkscreen extent -2.85,-2.5 1.6,2.88, body extent -3,-2.45 3,2.45, height 1.63
DBV0005A_L [mm] "SOT23, 5-Leads, Body 3.05x1.75mm, Pitch 0.95mm, IPC High Density"
  rrect18% 0.8x0.55 smd: 1(-1.275,0.95) 2(-1.275,0) 3(-1.275,-0.95) 4(1.275,-0.95) 5(1.275,0.95)
  silkscreen extent -1.4,-1.55 0.5,1.9, body extent -1.42,-1.46 1.42,1.46, height 1.08
DIP794W53P254L1930H508Q16N [mm]
  rect 1.13x1.13 hole 0.73: 1(-3.97,8.89)
  round 1.13 hole 0.73: 2(-3.97,6.35) 3(-3.97,3.81) 4(-3.97,1.27) 5(-3.97,-1.27) 6(-3.97,-3.81) 7(-3.97,-6.35) 8(-3.97,-8.89) 9(3.97,-8.89) 10(3.97,-6.35) 11(3.97,-3.81) 12(3.97,-1.27) 13(3.97,1.27) 14(3.97,3.81) 15(3.97,6.35) 16(3.97,8.89)
  silkscreen extent -4.53,-9.84 3.3,9.84, body extent -3.94,-9.84 3.94,9.84, height 5.27
FP-2920L-MFG [mm]
  rect 2x5.3 smd paste+0 mask+0: 1(-3.3,0) 2(3.3,0)
  silkscreen extent -1.92,-2.72 1.92,2.72, body extent -4.4,-2.82 4.4,2.82, height 0.25
FP-B2B-XH-A_LF_SN-MFG [mm]
  rect 1.55x1.55 hole 1 paste-2539.97 mask+0: 1(-1.25,0.525)
  round 1.55 hole 1 paste-2539.97 mask+0: 2(1.25,0.525)
  silkscreen extent -4.5,-2.88 3.7,2.88, body extent -3.8,-2.98 3.8,2.98, height 0.25
FP-DCT0008A-IPC_A [mm]
  rect 1.854x0.416 smd paste+0 mask+0: 1(-1.75,0.975)
  rrect100% 1.854x0.416 smd paste+0 mask+0: 2(-1.75,0.325) 3(-1.75,-0.325) 4(-1.75,-0.975) 5(1.75,-0.975) 6(1.75,-0.325) 7(1.75,0.325) 8(1.75,0.975)
  silkscreen extent -3.3,-1.48 0.32,1.48
FP-PVG5A-MFG [mm]
  rect 1.3x1.6 smd paste+0 mask+0: 1(-1.25,-1.45) 3(1.25,-1.45)
  rect 2x1.6 smd paste+0 mask+0: 2(0,1.45)
  silkscreen extent -2.52,-2.92 2.52,1.88, body extent -2.63,-2.35 2.63,2.35, height 0.25
FP-RT314012-MFG [mm]
  round 2 hole 1.3 paste-2539.97 mask+0: 11(8.15,-3.75) 11(8.15,3.75) 12(3.11,-3.75) 12(3.11,3.75) 14(13.19,-3.75) 14(13.19,3.75) A2(-12.15,3.75)
  rect 2x2 hole 1.3 paste-2539.97 mask+0: A1(-12.15,-3.75)
  silkscreen extent -16.47,-6.35 14.5,6.35, body extent -14.6,-6.45 14.6,6.45, height 0.25
FP-S6-6-05-08-1636-IPC_A [mm]
  rect 1.54x0.566 smd paste+0 mask+0: 1(-1.216,0.95)
  rrect100% 1.54x0.566 smd paste+0 mask+0: 2(-1.216,0) 3(-1.216,-0.95) 4(1.216,-0.95) 5(1.216,0) 6(1.216,0.95)
  silkscreen extent -2.61,-1.45 0.05,1.45, body extent -2.49,-1.95 2.49,1.95, height 0.25
FP-SOD323-MFG [mm]
  rect 0.86x0.54 smd paste+0 mask+0: 1(-1.07,0) 2(1.07,0)
  silkscreen extent -2.2,-0.72 0.9,0.72, body extent -1.6,-0.82 1.6,0.82, height 0.25
FP-SOT753-MFG [mm]
  rect 0.8x0.55 smd paste-1000 mask+0: 1(-1.2,0.95) 2(-1.2,0) 3(-1.2,-0.95) 4(1.2,-0.95) 5(1.2,0.95)
  silkscreen extent -2.27,-1.55 0.85,1.55, body extent -1.73,-1.65 1.73,1.65, height 0.25
LED_0805_BLUE [mm]
  rrect25% 1x1.7 smd: A(0.95,0) K(-0.95,0)
  silkscreen extent -1.8,-1.2 -0.9,1.2, body extent -1,-0.63 1,0.63, height 1.12
LED_0805_GREEN [mm]
  rrect25% 1x1.7 smd: A(0.95,0) K(-0.95,0)
  silkscreen extent -1.8,-1.2 -0.9,1.2, body extent -1,-0.63 1,0.63, height 1.12
ONSC-SOT-23-3-318-08_V [mm] "SOT23, 3-Leads, Body 2.92x1.3mm, Pitch 0.95mm"
  rect 0.9x0.8 smd: 1(-1,0.95) 2(-1,-0.95) 3(1,0)
  silkscreen extent -1.12,-1.46 0.65,2.03, body extent -0.65,-1.46 0.65,1.46, height 1.11
RCT-0C [mm]
  rect 2.3x1.4 smd: 1(0,0)
RES_0805 [mm]
  rrect25% 1x1.7 smd: 1(-0.95,0) 2(0.95,0)
  body extent -1,-0.63 1,0.63, height 0.47
SAMTEC_IPBT-102-H1-T-S-K [mm]
  rect 2.13x2.13 hole 1.78: 1(-2.095,0)
  round 2.13 hole 1.78: 2(2.095,0)
  silkscreen extent -6.5,-8 6.5,4, body extent -4.89,-3.99 4.83,3.28, height 10.29
SOT95P280X125-5N [mm]
  rect 0.9x0.6 smd: 1(-1.4,0.95) 2(-1.4,0) 3(-1.4,-0.95) 4(1.4,-0.95) 5(1.4,0.95)
  silkscreen extent -1.85,-1.45 0.6,1.5, body extent -1.4,-1.45 1.4,1.45, height 1.25

## Part data
C103 C104 C201 C202 C203 C205 C206 C207 C208 C209 C210 C211 C212 C213 C214 C215 C216 C217 C218 C219 C220 C301 C302 C303 C401 C402 C501 C502 C503 C504 C505 C506 C507 C508 C601 C602 C701 C702: library part CAP_0805, "Capacitor SMD 0805"
D101 D701: library part LED_0805_GREEN, "LED 0805 GREEN SMD"
D201 D202 D203 D204 D301 D401 D501 D502 D601: library part LED_0805_BLUE, "LED 0805 BLUE SMD"
F101: library part CMP-08606-000019-1, "PTC RESET FUSE 33V 1.85A 2920", Current Rating=40A, Hold Current=1.85A, Manufacturer=Littelfuse, Package=2920L, Resistance=0.05-0.15Ω, Temperature="-40°C to +85°C", Temperature Range High=+85°C, Temperature Range Low=-40°C, Trip Current=3.7A, Voltage Rating=33V, Automotive=No, Category=Fuse, ComponentLink2Description=Datasheet, ComponentLink2URL=https://www.littelfuse.com/~/media/electronics/datasheets/resettable_ptcs/littelfuse_ptc_2920l_datasheet.pdf.pdf, Device Class L1="Circuit Protection", Device Class L2="PTC Resettable Fuses", Device Class L3=unset, Digikey Description="PTC RESET FUSE 33V 1.85A 2920", Height=1.25mm, Lead Free=Yes, Manufacturer Part Number=2920L185DR, Mouser Description="Resettable Fuses - PPTC 1.85A 33V 2920", Octopart=https://octopart.com/2920l185dr-littelfuse-673785, RoHS=TRUE, Trip Time=2.5s
IC203: "Integrated Circuit", Manufacturer_Name="Texas Instruments", Mouser Part Number=595-CD4043BE, Arrow Part Number=CD4043BE, Arrow Price/Stock=https://www.arrow.com/en/products/cd4043be/texas-instruments?region=nac, Datasheet Link=http://www.ti.com/lit/ds/symlink/cd4043b.pdf, Height=5.08mm, Manufacturer_Part_Number=CD4043BE, Mouser Price/Stock=https://www.mouser.co.uk/ProductDetail/Texas-Instruments/CD4043BE?qs=5h8QSfodyRh52gnjNYecnw%3D%3D
IC206 IC207: "2 input AND Gate", Manufacturer_Name="ROHM Semiconductor", Mouser Part Number=755-BU4S81G2-TR, Arrow Part Number=BU4S81G2-TR, Arrow Price/Stock=http://www.arrow.com/en/products/bu4s81g2-tr/rohm-semiconductor, Datasheet Link=https://datasheet.datasheetarchive.com/originals/distributors/Datasheets_SAMA/21777083f110a10ff84f688f34e42d67.pdf, Height=1.25mm, Manufacturer_Part_Number=BU4S81G2-TR, Mouser Price/Stock=https://www.mouser.co.uk/ProductDetail/ROHM-Semiconductor/BU4S81G2-TR?qs=4kLU8WoGk0tE1tJdygJcrQ%3D%3D
J101 J102 J103 J104 J105 J106 J108 J109 J110 J111 J112 J113 J114 J115 J116: library part CMP-034-000000-7, ".165\" Power Mate Isolated Power Terminal Header", Package=None, Availability=Unavailable, Component Type=Standard, Design Item ID=IPBT-102-H1-T-S-K, MF=Samtec, MP=IPBT-102-H1-T-S-K, Pin Count=2, Price=None, Source=IPBT-102-H1-T-S-K.SchLib
J107 J201 J202 J203 J204 J301 J302 J401 J402 J501 J502 J503 J601 J701: library part CMP-2000-05888-3, "CONN HEADER VERT 2POS 2.5MM", Color=Natural, Contact Resistance=20mR, Current Rating=3A, Housing Color=White, Insulation Resistance=1GR, Max Operating Temperature=85°C, Max Voltage Rating (AC)=250V, Min Operating Temperature=-25°C, Connector Type="Male Pin", Contact Material=Brass, Contact Plating=Tin, Contact Type="Male Pin", Depth=5.75mm, Fastening Type=Detent, Housing Material=Polyamide, Lead Free="Lead Free", Lead Pitch=2.5mm, Length=7.4mm, Max Current Rating=3A, Max Voltage Rating (DC)=250V, Mount="Through Hole", Number of Contacts=2, Number of Positions=2, Number of Rows=1, Orientation=Straight, Packaging=Bulk, Pitch=2.5mm, REACH SVHC="No SVHC", Series=XH, Termination=Solder, Voltage Rating=250V, Voltage Rating (AC)=250V, Wire/Cable Gauge=22AWG
K201 K301 K401 K501 K601 K701: library part CMP-03395-000105-1, "RELAY GEN PURPOSE SPDT 16A 12V", Ambient Temperature Range High=+85°C, Ambient Temperature Range Low=-40°C, Coil Power=400mW, Coil Resistance=360Ω, Coil Voltage=12V, Current Rating=16A, Manufacturer="TE Connectivity", Automotive=No, Category=Relay, Coil Type=Non-Latching, ComponentLink2Description=Datasheet, ComponentLink2URL=https://www.te.com/commerce/DocumentDelivery/DDEController?Action=showdoc&DocId=Data+Sheet%7FRT1%7F0219%7Fpdf%7FEnglish%7FENG_DS_RT1_0219.pdf%7F9-1393239-5, Device Class L1=Electromechanical, Device Class L2=Relays, Device Class L3="Power Relays", Digikey Description="RELAY GEN PURPOSE SPDT 16A 12V", Height=15.7mm, Lead Free=Yes, Manufacturer Part Number=RT314012, Number of Contacts=1, Octopart=https://octopart.com/9-1393239-5-te+connectivity-46509288, Package=RT314012, RoHS=TRUE, Throw Configuration=SPDT
Q201 Q202 Q203 Q204 Q205 Q301 Q302 Q401 Q402 Q502 Q503 Q505 Q601 Q602 Q701 Q702: library part CMP-1048-00659-1, "High Voltage Transistor, NPN Silicon, 3-Pin SOT-23, Pb-Free, Tape and Reel", Manufacturer="On Semiconductor", ComponentLink1Description="Manufacturer URL", ComponentLink1URL=http://www.onsemi.com/, ComponentLink2Description=Datasheet, ComponentLink2URL=http://www.onsemi.cn/pub_link/Collateral/MMBT5550LT1-D.PDF, ComponentLink3Description="Package Specification", ComponentLink3URL=http://www.onsemi.cn/pub_link/Collateral/318-08.PDF, DatasheetVersion="Rev. 10", IC Continuous (A)=0.6, Mounting Technology="Surface Mount", PackageDescription="3-Pin Small Outline Transistor, Body 2.92 x 1.3 mm, Pitch 0.95 mm", PackageReference=SOT-23-3-318-08, PackageVersion="Rev. AP, 11/2009", Packing="Tape and Reel", PartNumber=MMBT5550LT1G, Polarity=NPN, RoHS=TRUE
R101 R102 R201 R202 R203 R204 R205 R206 R207 R208 R209 R210 R211 R212 R213 R214 R215 R301 R302 R303 R304 R305 R401 R402 R403 R404 R405 R501 R502 R503 R504 R505 R506 R507 R510 R511 R601 R602 R603 R604 R701 R702 R703 R704 R705: library part RES_0805, "Resistor SMD 0805"
R218 R219 R220 R221 R222 R223 R224: library part CMP-00059-71612330-1, "PVG5A104C03R00 Resistor Trimmer, Cermet, 100 kOhm, ± 10%, 250 mW, 12 Turn, Multi Turn, Surface Mount", Max Operating Temperature=125°C, Max Power Dissipation=250mW, Min Operating Temperature=-55°C, Resistance=100kΩ, Temperature Coefficient=150ppm/°C, Tolerance=10%, Composition=Cermet, Height=5.1054mm, Mount="Surface Mount", NexarPartId=71612330, Number of Turns=11, Power Rating=250mW, RoHS=Compliant, Schedule B="8533400080, 8533400080"
TP101 TP102 TP103 TP104 TP201 TP202 TP203 TP204 TP205 TP206 TP207 TP208 TP209 TP210 TP211 TP301 TP401 TP501 TP502 TP601 TP701: "Test Point", Manufacturer_Name="TE Connectivity", Mouser Part Number=279-RCT-0C, Arrow Part Number=RCT-0C, Arrow Price/Stock=https://www.arrow.com/en/products/rct-0c/te-connectivity?region=nac, Datasheet Link=https://www.te.com/commerce/DocumentDelivery/DDEController?Action=srchrtrv&DocNm=1773266&DocType=Data%20Sheet&DocLang=English&PartCntxt=1625854-2&DocFormat=pdf, Manufacturer_Part_Number=RCT-0C, Mouser Price/Stock=https://www.mouser.co.uk/ProductDetail/TE-Connectivity-Holsworthy/RCT-0C?qs=ip69W3eHERWzZOsRKmFYAw%3D%3D
U201 U204 U205 U211 U212: library part CMP-0272-03289-3, "Automotive Catalog Advanced LinCMOS(TM) Rail-to-Rail Operational Amplifier, 4.4 to 16 V, -40 to 125 degC, 8-pin SOIC (D8), Green (RoHS & no Sb/Br)", Manufacturer="Texas Instruments", Rating=Automotive, Total Supply Voltage(Max)(+5V is 5, +/-5V is 10)=16, Total Supply Voltage(Min)(+5V is 5, +/-5V is 10)=4.4, CMRR(Min)(dB)=70, Code_JEDEC=MS-012, ComponentLink1Description="Manufacturer URL", ComponentLink1URL=http://www.ti.com/, ComponentLink2Description=Datasheet, ComponentLink2URL=http://www.ti.com/lit/ds/symlink/tlc2272a-q1.pdf, ComponentLink3Description="Package Specification", ComponentLink3URL=http://www.ti.com/litv/pdf/msoi002j, DatasheetVersion=SGLS007E, Eco-Plan="Green (RoHS & no Sb/Br)", GBW(Typ)(MHz)=2.18, IIB(Max)(pA)=60, Iq per channel(Max)(mA)=1.5, Mounting Technology="Surface Mount", Number of Channels=2, Offset Drift(Typ)(uV/C)=2, PackageDescription="8-Pin Plastic Small Outline, Body 4.9 x 3.9 mm, Pitch 1.27 mm", PackageReference=D0008A, PackageVersion="4040047-3/M, 06/2011", Packing="LARGE T&R", PartNumber=TLC2272AQDRQ1, Slew Rate(Typ)(V/us)=3.6, Sub Family="Low Noise Amp (<=10nV/rtHz), Precision Amplifier", Vio (25C)(Max)(mV)=0.95
U203 U302 U402 U502 U602 U702: library part CMP-2000-05927-2, "DIODE SCHOTTKY 40V 300MA SOD323", Capacitance=7pF, Forward Current=300mA, Manufacturer=STMicroelectronics, Max Junction Temp=+150°C, Max Repetitive Reverse Voltage=40V, Max Surge Forward Current=1.25A, Package=SOD323, Peak Reverse Current=1uA, Temperature="-40°C to +150°C", Temperature Range Low=-40°C, Automotive=No, Category=IC, ComponentLink2Description=Datasheet, ComponentLink2URL=https://www.st.com/resource/en/datasheet/bat54.pdf, Device Class L1="Discrete Semiconductors", Device Class L2=Diodes, Device Class L3="Schottky Diodes", Digikey Description="DIODE SCHOTTKY 40V 300MA SOD323", Height=1.17mm, Ipc Land Pattern Name=SOD250128X117-2, Lead Free=Yes, Manufacturer Part Number=BAT54JFILM, Mouser Description="Schottky Diodes & Rectifiers 300mA 40 Volt", Octopart=https://octopart.com/bat54jfilm-stmicroelectronics-326073, RoHS=TRUE, Standoff Height=0mm, Temperature Range High=+150°C
U206: library part CMP-09075-000004-1, "IC DELAY BLOCK 8TAP PROG TSOT23", Case/Package=SOT-23-6, Max Operating Temperature=85°C, Min Operating Temperature=-40°C, Package Quantity=500, Mount="Surface Mount", Number of Pins=23, Number of Taps/Steps=8, Packaging="Tape and Reel", RoHS Compliant=Yes, Series=TimerBlox®
U207 U208 U209 U210 U214 U215 U216 U505: library part CMP-14350-000001-1, "IC GATE OR 1CH 2-INP 5TSOP", Ambient Temperature Range High=+125°C, Ambient Temperature Range Low=-40°C, Frequency=150MHz, Manufacturer=Nexperia, Max Supply Voltage=5.5V, Min Supply Voltage=1.65V, Package=SOT753, Temperature="-40°C to +125°C", Automotive=No, Category=IC, ComponentLink2Description=Datasheet, ComponentLink2URL=https://assets.nexperia.com/documents/data-sheet/74LVC1G32.pdf, Device Class L1="Integrated Circuits (ICs)", Device Class L2="Logic ICs", Device Class L3="Logic Gates", Digikey Description="IC GATE OR 1CH 2-INP 5TSOP", Footprint Url=https://assets.nexperia.com/documents/outline-drawing/SOT753.pdf, Height=1.1mm, Ipc Land Pattern Name=SOT95P275X100-5, Lead Free=Yes, Logic Function Desc=OR, Manufacturer Part Number=74LVC1G32GV,125, Number of Circuits=1, Number of Inputs=2, Number Of Outputs=1, Octopart=https://octopart.com/74lvc1g32gv%2C125-nexperia-78737904, Propagation Delay=1.7ns, RoHS=TRUE, Standoff Height=0.013mm, Temperature Range High=+125°C, Temperature Range Low=-40°C
U213 U303 U503 U504 U507 U701: library part CMP-0859-00030-4, "Single Schmitt-Trigger Inverter, DBV0005A, LARGE T&R", F @ Nom Voltage(Max)(Mhz)=150, Generic Part Number=SN74LVC1G14, ICC @ Nom Voltage(Max)(mA)=0.01, Manufacturer="Texas Instruments", Operating Temperature Range(C)="-40 to 125,-40 to 85", Rating=Catalog, tpd @ Nom Voltage(Max)(ns)=11,6.5,5.5,5, Voltage(Nom)(V)=1.8,2.5,3.3,5, 3-State Output=No, Bits(#)=1, DatasheetVersion=SCES218W, Input Type=CMOS/TTL, Logic=Inverting, Output Drive (IOL/IOH)(Max)(mA)=32/-32, Output Type=CMOS, PackageReference=DBV0005A, Schmitt Trigger=Yes, Sub-Family="Inverting Buffer/Driver", Technology Family=LVC, VCC(Max)(V)=5.5, VCC(Min)(V)=1.65
U301 U401 U501 U506 U601: library part CMP-0859-00563-4, "IC GATE NOR 2CH 2-INP SM8", Case/Package=SSOP, High Level Output Current=-32mA, Low Level Output Current=32mA, Max Operating Temperature=125°C, Max Supply Voltage=5.5V, Min Operating Temperature=-40°C, Min Supply Voltage=1.65V, Operating Supply Voltage=3.3V, Package Quantity=1, Quiescent Current=10uA, Lead Free="Lead Free", Logic Function="NOR GATE", Max Output Current=32mA, Mount="Surface Mount", Number of Bits=2, Number of Circuits=2, Number of Elements=2, Number of Gates=2, Number of Input Lines=2, Number of Inputs=2, Number of Output Lines=1, Number Of Outputs=1, Number of Pins=8, Output Current=32mA, Packaging="Tape and Reel", Propagation Delay=4.4ns, Radiation Hardening=No, REACH SVHC="No SVHC", RoHS Compliant=Yes, Termination=SMD/SMT, Turn-On Delay Time=4.4ns, Weight=0.000825oz

## Free pads (board coordinates)
  round 5 hole 5 unplated paste-2539.97 mask+0: MH(25,20) MH(75,120) MH(125,120) MH(175,20)

## Via types
v1: diameter 0.7, hole 0.4, L1 (Signal) to L4 (Signal), tented both sides, 142 vias
v2: diameter 0.9, hole 0.6, L1 (Signal) to L4 (Signal), tented both sides, 49 vias
v3: diameter 1.5, hole 1, L1 (Signal) to L4 (Signal), tented both sides, 4 vias
v4: diameter 0.7, hole 0.3, L1 (Signal) to L4 (Signal), tented both sides, 3 vias

## Nets (pads, with @x,y where several pads share a name; then routed paths per layer and width w, separated by ;. In a path a pad name is that pad's centre, name@x,y a point inside that pad or via, vN(x,y) a via of type N, cw(c..) or ccw(c..) an arc to the next point about the centre after c; other vN are vias at no path point)
+5V: C103.2 C104.2 C205.2 C206.2 C207.2 C208.2 C209.2 C210.2 C211.2 C212.2 C213.2 C214.2 C215.2 C216.2 C217.1 C218.1 C219.1 C220.1 C302.1 C303.1 C402.1 C503.2 C504.2 C505.2 C506.2 C507.2 C508.2 C601.2 C702.2 D101.A IC203.5 IC203.16 IC206.5 IC207.5 J107.1 J116.1 R205.2 R207.2 R209.2 R211.2 R212.2 R218.1 R219.1 R220.1 R221.1 R222.1 R223.1 R224.1 R304.2 R404.2 R504.2 R506.2 R510.2 R511.2 R601.2 R701.2 TP102.1 U201.8 U204.8 U205.8 U206.5 U207.5 U208.5 U209.5 U210.5 U211.8 U212.8 U213.5 U214.5 U215.5 U216.5 U301.8 U303.5 U401.8 U501.8 U503.5 U504.5 U505.5 U506.8 U507.5 U601.8 U701.5 | length 833.4
  L1 (Signal) w0.3: C213.2@33,45.393 34.568,45.393 35.376,46.201 36.195,46.201 36.345,46.351 U212.8@36.345,46.725 ; U211.8@34.155,57.775 34.155,57.35 35.148,56.357 C211.2@37.35,56.357 ; C205.2@35.143,99.5 35.143,99.364 35.691,98.815 35.828,98.815 36.17,98.473 36.17,97.305 U201.8@36.067,97.203 ; C212.2@37.5,64.643 38.035,64.108 38.392,64.108 38.664,63.836 v2@39.164,63.836 ; v2(39.25,63.75) 40.445,63.749 40.595,63.599 U205.8@40.595,63.225 ; U207.5@42.95,96.2 46.093,96.2 C206.2@46.25,96.357 ; C215.2@46.65,69.643 v2@47.885,70.878 ; C215.2@46.707,69.643 47.15,69.2 U209.5@49.05,69.2 ; U206.5@48.716,91.5 v2(51,91.5) 51.087,91.413 52.45,91.413 52.8,91.063 R212.2@52.8,90.75 ; U214.5@59.45,67.05 C219.1@61.793,67.05 ; C219.1@61.943,67.05 C219.1@62,67.107 ; U216.5@65.7,61.05 66.974,61.05 67.281,61.357 C220.1@69.25,61.357 69.5,61.107 v1(69.5,59.75) ; U215.5@66.45,67.55 68.193,67.55 C218.1@68.691,67.052 ; v1(66.75,66) 68.022,66 68.197,66.176 68.197,66.559 C218.1@68.691,67.052 ; C218.1@68.693,67.05 C218.1@68.691,67.052 ; C218.1@68.75,67.107 68.745,67.107 C218.1@68.691,67.052 ; v3(89.25,30) 89.25,33 89.75,33.5 C103.2@92.75,33.5 92.678,33.572 92.678,36.929 C104.2@92.607,37 ; C303.1@103.143,116.75 103.293,116.6 103.293,113.779 103.947,113.779 U301.8@104,113.725 104.023,113.747 106.609,113.747 107,113.356 v1(107,113.25) ; C302.1@104.25,104.25 U303.5@104.25,106.925 ; v1(125,40.5) 126.232,41.732 126.232,45.125 C601.2@126.607,45.5 126.232,45.875 126.232,48.496 126.178,48.55 U601.8@125.999,48.55 ; C702.2@128,37.893 C702.2@128.132,38.025 ; v1(128.5,40) 128.5,38.393 C702.2@128.132,38.025 ; U701.5@130.8,38.025 C702.2@128.132,38.025 ; U507.5@157.7,52.95 160.736,52.95 C508.2@160.75,52.964 ; U505.5@158.7,63.05 158.7,62.925 159.107,62.518 C507.2@159.107,60.5 159.107,60.364 159.655,59.815 159.792,59.815 160.857,58.75 v1(165.25,58.75) ; C402.1@159.643,113.75 159.643,110.779 159.697,110.725 U401.8@160,110.725 161.721,110.725 v1@161.946,110.5 ; v1(167,63.75) 167.05,63.75 168.45,62.35 R506.2@168.45,62 168.7,61.75 C505.2@171.607,61.75 171.607,62.108 171.322,62.393 171.322,62.671 169.975,64.018 U504.5@169.975,64.8 ; U506.8@167.475,69.5 167.475,70.053 167.529,70.107 170.7,70.107 170.75,70.157 C506.2@170.85,70.257
  L1 (Signal) w0.5: R224.1@24.05,41 23.75,41.3 v2(23.75,43.75) 22.5,45 22.5,47.742 23.5,48.742 23.5,48.892 23.9,49.292 R223.1@24.05,49.292 24.05,51.95 22.5,53.5 22.5,56.033 23.5,57.033 23.5,57.183 23.9,57.583 R222.1@24.05,57.583 24.05,59.7 22.5,61.25 22.5,64.325 23.5,65.325 23.5,65.475 23.9,65.875 R221.1@24.05,65.875 24.05,68.45 22.5,70 22.5,72.617 23.5,73.617 23.5,73.767 R220.1@23.9,74.167 ; R220.1@24.05,74.167 R220.1@23.9,74.167 ; R219.1@24.05,82.458 R219.1@23.9,82.458 ; R218.1@24.05,90.75 23.9,90.75 23.5,90.35 23.5,90.2 22.5,89.2 22.5,84.008 23.5,83.008 23.5,82.858 R219.1@23.9,82.458 ; v2(35.75,54.75) 35.827,54.827 36.437,54.827 36.979,55.369 36.979,55.907 C211.2@37.429,56.357 ; U201.8@35.975,97.155 36.022,97.203 36.067,97.203 37.702,97.203 v2(37.75,97.25) ; U212.8@36.345,46.725 36.395,46.775 36.395,47.787 36.75,48.142 v2(36.75,48.25) ; v2(36.75,52) v2(41,52) ; IC206.5@40.15,86.7 40.3,86.7 v1(41.143,87.543) C207.2@41.143,89.25 ; v1(42.25,82.5) 42.212,82.462 42.212,80.705 42.162,80.655 U204.8@41.975,80.655 41.981,80.649 43.5,80.649 ; U208.5@42.45,70.7 42.418,70.7 42.393,70.725 C214.2@42.393,73.5 42.393,73.65 42.843,74.1 43.1,74.1 43.5,74.5 43.5,80.649 ; v2(44,35.5) R205.2@44,37.5 ; C216.2@45.893,52.25 v2(45.893,50.5) 45.893,49.632 46.325,49.2 U210.5@46.45,49.2 ; v2(48.75,39) 48.75,39.25 50.65,41.15 52.25,41.15 R207.2@52.5,41.4 ; C209.2@52.214,94 52.232,94.018 52.232,95.732 v2(52.25,95.75) 58,95.75 58.857,94.893 C210.2@60.25,94.893 60.378,95.021 63,95.021 63.05,95.071 IC207.5@63.05,95.15 ; IC203.16@53.55,83.19 53.38,83.19 52.583,82.393 C217.1@50.5,82.393 50.05,81.943 49.9,81.943 49.284,81.327 48.327,81.327 v2(48.25,81.25) 48.142,81.25 47.541,80.649 43.5,80.649 ; R209.2@56.25,35.5 56.462,35.288 57.712,35.288 v1(57.75,35.25) ; TP102.1@56.75,20.5 57,20.5 57.45,20.95 D101.A@57.45,24.5 57.45,24.769 57.7,25.019 59.769,25.019 68.462,33.712 68.462,35.462 v1(68.5,35.5) ; U213.5@57.025,62.45 57.15,62.45 58.173,63.473 58.173,63.673 v2(58.25,63.75) ; v2(60.5,65.5) 61.25,65.5 61.7,65.95 61.7,66.807 C219.1@61.943,67.05 ; R211.2@64.9,37.75 64.9,35.654 65,35.554 v1(65,35.5) ; R304.2@93.8,103.5 93.962,103.662 93.962,105.462 v1(94,105.5) ; v1(103.25,107) 103.275,107.025 104.45,107.025 U303.5@104.475,107.05 ; v1(134.25,109.5) 134.288,109.538 136.75,109.538 137,109.788 R404.2@137,110 ; v1@161.946,110.5 v1(162,110.5) ; v1(162.5,107.25) 163.25,106.5 168.75,106.5 169.443,105.807 170.75,105.807 170.826,105.731 172.019,105.731 173.175,104.575 173.7,104.575 U503.5@173.725,104.55 ; R504.2@167,77.8 R504.2@167.144,77.8 ; R504.2@167.35,77.8 R504.2@167.144,77.8 ; R504.2@167.35,77.944 167.456,78.05 168.05,78.05 169.25,79.25 R511.2@169.25,83.1 167.9,83.1 167,84 167,89.5 169.193,91.693 170.3,91.693 C504.2@170.5,91.893 ; R510.2@170.75,105.8 170.75,103 171.25,102.5 171.25,95.25 170.25,94.25 170.25,92.143 C504.2@170.5,91.893 ; C503.2@171.357,75.75 171.307,75.7 170.2,75.7 169.75,75.25 v1(169,75.25) 167.394,76.856 167.394,77.55 R504.2@167.144,77.8 ; U501.8@173.971,91.669 170.724,91.669 C504.2@170.5,91.893 ; R220.1@23.9,74.167 23.5,74.567 23.5,74.717 22.442,75.775 22.442,81 R219.1@23.9,82.458
  L1 (Signal) w1: C206.2@46.25,96.357 46.357,96.25 v2(48.75,96.25) ; R601.2@137.95,57.75 137.95,51.5 141.65,47.8 141.65,47.45 R701.2@142,47.45 143.3,47.45 144.25,46.5 v1(144.25,45) ; C508.2@160.75,52.964 164.964,52.964 v1(165,53) ; v1(170.75,68.5) C506.2@170.75,70.157 ; C506.2@170.85,70.257 170.95,70.357 C506.2@171,70.357
  L1 (Signal) w2: v3(89.25,30) 93.75,30 94.08,30.33 v3(94.5,30.33) 94.5,30 101.495,23.005 101.495,22.315 J116.1@101.56,22.25
  L4 (Signal) w0.3: v2(60.5,65.5) 60.615,65.615 61.365,65.615 61.75,66 v1(66.75,66) 66.8,65.95 67.55,65.95 69.5,64 v1(69.5,59.75)
  L4 (Signal) w0.5: v2(35.75,54.75) 35.75,53 v2(36.75,52) v2(36.75,48.25) ; v2(37.75,97.25) 39.75,99.25 42.5,99.25 45.5,96.25 v2(48.75,96.25) 51.642,96.25 52.142,95.75 v2(52.25,95.75) 52.25,92.75 v2(51,91.5) ; v2(39.25,63.75) 48.25,63.75 v2(58.25,63.75) 58.75,63.75 v2(60.5,65.5) ; v2(41,52) 41,53.5 41.75,54.25 48.25,54.25 ; v1(41.143,87.543) 41.143,84.607 42.25,83.5 v1(42.25,82.5) ; v2(45.893,50.5) 48.25,50.5 ; 48.25,72.75 61.21,72.75 IC203.5@63.71,75.25 ; v1(94,105.5) 95.5,107 v1(103.25,107) 108.125,111.875 ; v1(162,110.5) 162,110.446 162.5,109.946 v1(162.5,107.25)
  L4 (Signal) w1: v1(107,113.25) 108.25,112 108.25,111.75 ; 144.25,40.25 v1(144.25,45) ; 166.5,67.25 169,67.25 169.03,67.28 169.53,67.28 v1(170.75,68.5) ; 166.5,71.078 166.5,72.5 169,75 v1(169,75.25)
  L4 (Signal) w2: v2(23.75,43.75) 25.25,43.75 33.5,35.5 v2(44,35.5) 48.25,35.5 ; v2(48.75,96.25) 48.75,81.75 v2(48.25,81.25) 48.25,72.75 48.25,63.75 48.25,54.25 48.25,50.5 48.25,35.5 ; J107.1@89,43.25 89,42 94.5,36.5 ; v3(89.25,30) 83.75,35.5 v1(68.5,35.5) v1(65,35.5) 48.25,35.5 ; v3(94.5,30.33) 94.5,36.5 ; 108.25,111.75 122.098,111.75 122.145,111.704 132.046,111.704 v1(134.25,109.5) 137,106.75 151.5,106.75 155,103.25 155,80.5 158.25,77.25 158.999,76.501 162.95,72.55 162.95,72.25 165.328,72.25 166.5,71.078 166.5,67.25 166.5,60.25 165.25,59 v1(165.25,58.75) v1@165.25,53 ; v1(165,53) 165,42 163.25,40.25 144.25,40.25 128.75,40.25 v1(128.5,40) 128.5,40.5 v1(125,40.5) 114.5,40.5 111.75,37.75 94.5,37.75 94.5,36.5
  other v2: 48,70.75
+12V: F101.1 J115.1 K201.A1 K301.A1 K401.A1 K501.A1 K601.A1 K701.A1 TP101.1 U203.1 U302.1 U402.1 U502.1 U602.1 U702.1 | length 358.6
  L1 (Signal) w0.3: v3@99.25,30 100.5,28.75 TP101.1@104.75,28.75
  L1 (Signal) w1: U203.1@54.07,44 56.35,46.28 K201.A1@56.35,48.5 ; U302.1@74.68,96.5 74.68,93.97 K301.A1@76.5,92.15 ; v1(123.5,34.25) 123.5,34.43 U602.1@124.25,35.18 ; v1(130,32.5) v1(141.75,32.5) ; U502.1@148.07,59.25 148.07,60.09 K501.A1@151.58,63.6 ; v1(153,56.75) 153,62.514 152.414,63.1 152,63.1 K501.A1@151.5,63.6 151.5,74.75 159.5,82.75 v1(159.5,91) ; v1(158,50.75) 163.75,50.75 167,47.5 172.65,47.5 174.693,45.457 K701.A1@175.9,44.25 ; v1(161,30) 161.18,30.18 U702.1@170.5,30.18 ; K401.A1@165.15,102.75 168.08,99.82 U402.1@169.5,99.82
  L1 (Signal) w2: v3(99.25,30.5) 101,32.25 101,37.578 102.172,38.75 116.25,38.75 K601.A1@120,35
  L1 (Signal) w2.5: J115.1@67.81,22.25 67.81,25.96 70.95,29.1 70.95,35.7 75,39.75 v1(77.25,39.75)
  L4 (Signal) w1: K201.A1@56.35,48.5 64.75,48.5 73.5,39.75 v1(77.25,39.75) 82,44.5 82.75,44.5 87.5,49.25 87.5,81.15 K301.A1@76.5,92.15 ; K601.A1@120,35 122.75,35 v1(123.5,34.25) 124.375,33.375 125.25,32.5 v1(130,32.5) ; v1(141.75,32.5) 144.25,30 v1(161,30) 168.075,37.075 168.075,37.925 173.9,43.75 175.4,43.75 K701.A1@175.9,44.25 ; v1(153,56.75) 158,51.75 v1(158,50.75) ; v1(159.5,91) 159.5,97.1 K401.A1@165.15,102.75
  L4 (Signal) w2.5: J115.1@67.81,22.25 67.81,24.56 69.75,26.5 96.786,26.5 99.25,28.964 v3@99.25,30
ACCUM_BAD: IC203.14 U210.4 | length 43.5
  L1 (Signal) w0.3: U210.4@46.45,47.3 46.575,47.3 46.7,47.425 46.7,47.55 47.25,48.1 47.25,60.75 52.25,65.75 52.25,73.75 51.75,74.25 51.75,76.31 52.94,77.5 56.5,77.5 58.63,79.63 IC203.14@58.63,83.19
ACCUM_BAD_LATCH: IC203.1 R206.2 U214.1 | length 41
  L1 (Signal) w0.3: R206.2@48.5,43.7 48.65,43.55 49.25,43.55 49.25,59.25 55,65 55,68.25 ; IC203.1@53.55,75.25 55,73.8 55,68.25 ; U214.1@59.45,69.45 59.45,68.45 59.25,68.25 55,68.25
ACCUM_CURRENT: C203.2 J203.1 R203.2 TP203.1 U204.3 U212.3 U212.6 | length 103.5
  L1 (Signal) w0.3: U204.3@36.525,78.115 U204.3@36.95,78.115 ; v1(38.25,70.75) 38.25,76.815 U204.3@36.95,78.115 ; U212.3@38.885,41.275 38.885,45.5 ; U212.6@38.885,46.725 38.885,45.5 ; v1(42,45.5) 38.885,45.5 ; v1(43.5,85.75) 39.5,81.75 39.5,80.665 U204.3@36.95,78.115 ; v1(44.25,93.25) 46.952,93.25 51.027,97.325 51.027,98.723 48,101.75 TP203.1@48,104.5 ; TP203.1@48.15,104.5 48.7,105.05 R203.2@48.7,108 48.7,111.557 C203.2@48.893,111.75 56.541,111.75 58.909,114.118 58.909,118.616 J203.1@58.75,118.775
  L4 (Signal) w0.3: v1(38.25,70.75) 38.25,52.5 43,47.75 43,46.5 v1(42,45.5) ; v1(43.5,85.75) 42.75,86.5 42.75,91.75 v1(44.25,93.25)
ACCUM_CURRENT_REF: R220.2 TP206.1 U204.2 | length 14.4
  L1 (Signal) w0.3: R220.2@26.95,72.917 TP206.1@30.717,72.917 30.717,74.833 31.633,75.75 v1(32.5,75.75) ; v1(34.75,76.75) 34.75,78.5 35.5,79.25 36.39,79.25 U204.2@36.525,79.385
  L4 (Signal) w0.3: v1(32.5,75.75) 33.75,75.75 v1(34.75,76.75)
ACCUM_I_MAX_REF: R224.2 TP210.1 U212.2 | length 12.7
  L1 (Signal) w0.3: R224.2@26.95,39.75 26.95,39.65 27.6,39 TP210.1@31,39 36.374,39 36.55,39.176 36.55,39.207 37.004,39.661 37.161,39.661 37.615,40.115 U212.2@37.615,41.275
ACCUM_I_MIN_REF: R223.2 TP209.1 U212.5 | length 19.1
  L1 (Signal) w0.3: R223.2@26.95,48.042 29.592,48.042 TP209.1@30.55,49 ; TP209.1@31,49 31.45,49 32,49.55 32,49.824 32.176,50 v1(39.75,50) ; U212.5@40.155,46.725 41.394,46.725 41.919,47.25 v1(42,47.25)
  L4 (Signal) w0.3: v1(39.75,50) 41.923,47.827 41.923,47.327 v1(42,47.25)
ACCUM_OPEN: U210.1 U212.1 | length 24.4
  L1 (Signal) w0.3: U212.1@36.345,41.275 31.725,41.275 30.75,42.25 30.75,46 32.25,47.5 33.25,47.5 34.95,49.2 U210.1@44.05,49.2
ACCUM_POWER: IC206.2 U204.1 | length 6.4
  L1 (Signal) w0.3: U204.1@36.525,80.655 36.525,83.225 36,83.75 36,85.25 36.5,85.75 IC206.2@37.35,85.75
ACCUM_SHORT: U210.2 U212.7 | length 7.3
  L1 (Signal) w0.3: U212.7@37.615,46.725 37.615,47.15 38.715,48.25 U210.2@44.05,48.25
After_AMS: K401.14 K501.11 | length 28.1
  L1 (Signal) w2: K401.14@139.81,95.25 K401.14@139.81,102.75
  L4 (Signal) w2: K401.14@139.81,95.25 139.81,88.09 K501.11@144,83.9 K501.11@151.5,83.9
After_BOTS: J106.2 J108.1 K701.11 | length 88.8
  L1 (Signal) w2: J108.1@95.56,71.25 95.56,66.44 100.82,61.18 100.82,57.525 J106.2@100.845,57.5 ; K701.11@155.6,36.75 K701.11@155.6,44.25
  L4 (Signal) w2: J106.2@100.845,57.5 100.845,57.465 101,57.31 101,52.25 105.19,48.06 128.25,48.06 128.99,48.8 153.7,48.8 155.6,46.9 K701.11@155.6,44.25
After_BSPD: K201.14 K301.11 | length 35.9
  L1 (Signal) w2: K201.14@81.69,48.5 K201.14@81.69,56 73,64.69 73,68.35 K301.11@76.5,71.85 K301.11@84,71.85
After_ECU: J106.1 K601.14 | length 26
  L4 (Signal) w2: J106.1@96.655,57.5 96.72,57.565 96.72,59.578 97.892,60.75 112.09,60.75 K601.14@112.5,60.34 K601.14@120,60.34
After_GLVMS: J101.2 K201.11 | length 39
  L1 (Signal) w2: K201.11@76.65,56 K201.11@76.65,48.5 82.5,42.65 82.5,31.5 89.225,24.775 89.225,22.275 J101.2@89.25,22.25
After_IMD: J102.1 K301.14 | length 53.5
  L1 (Signal) w2: K301.14@76.5,66.81 K301.14@84,66.81 88,70.81 88,95.25 83.25,100 81.75,100 78.31,103.44 J102.1@78.31,106.25
After_PDOC: K501.14 K601.11 | length 65.1
  L1 (Signal) w2: K601.11@120,55.3 120.8,55.3 129.25,63.75 138.578,63.75 139.75,64.922 139.75,85.75 142.94,88.94 K501.14@144,88.94 K501.14@151.5,88.94
  L4 (Signal) w2: K601.11@112.5,55.3 K601.11@120,55.3
After_PRECHARGE: J113.1 K701.14 | length 33.7
  L1 (Signal) w2: J113.1@137.56,22 137.625,22.065 137.625,24.875 139.5,26.75 148.5,26.75 151.5,29.75 151.5,35.81 K701.14@150.56,36.75 K701.14@150.56,44.25
After_Shutdown_Buttons: J105.2 K401.11 | length 23.4
  L1 (Signal) w2: J105.2@132.095,101.75 136.345,106 141.6,106 K401.11@144.85,102.75 K401.11@144.85,95.25
AMS_FIL: C401.2 R401.2 R402.2 TP401.1 U401.6 | length 18.9
  L1 (Signal) w0.3: U401.6@160,109.425 164.139,109.425 C401.2@164.464,109.75 164.464,111.814 165.307,112.657 165.307,113.807 166.6,115.1 166.6,115.9 R401.2@166.95,116.25 166.95,120.45 TP401.1@167.25,120.75 ; TP401.1@166.307,121.3 166.857,120.75 166.857,121.3 TP401.1@167.7,121.3
AMS_IN: J401.1 R401.1 | length 9.6
  L1 (Signal) w0.3: J401.1@157.25,119.775 158.437,118.588 158.462,118.588 160.8,116.25 R401.1@165.05,116.25 R401.1@165.05,115.9